# Allegro board S500_TPE_minimal_system_0312PCB.brd
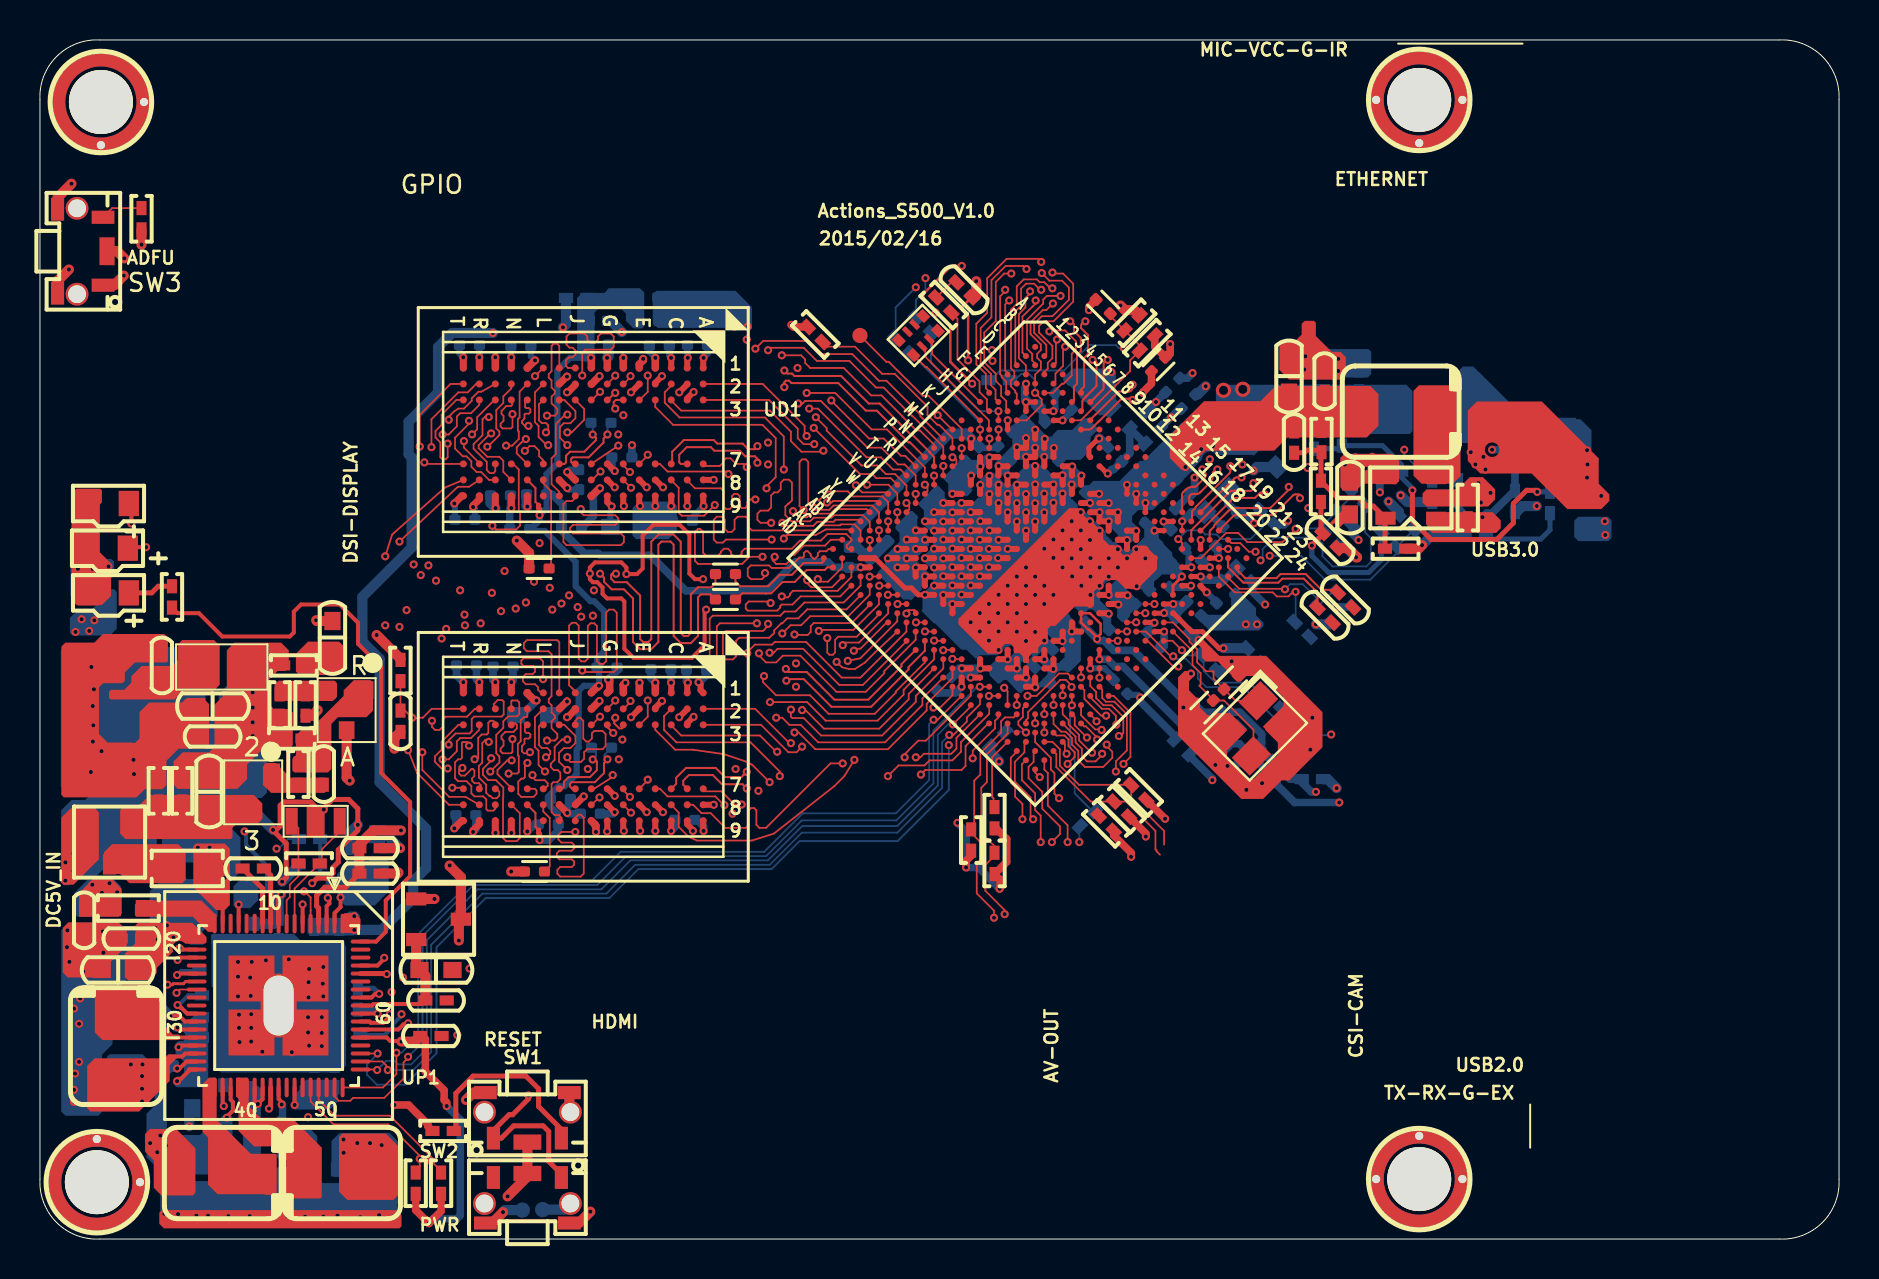
[diagram p0: board, top side]
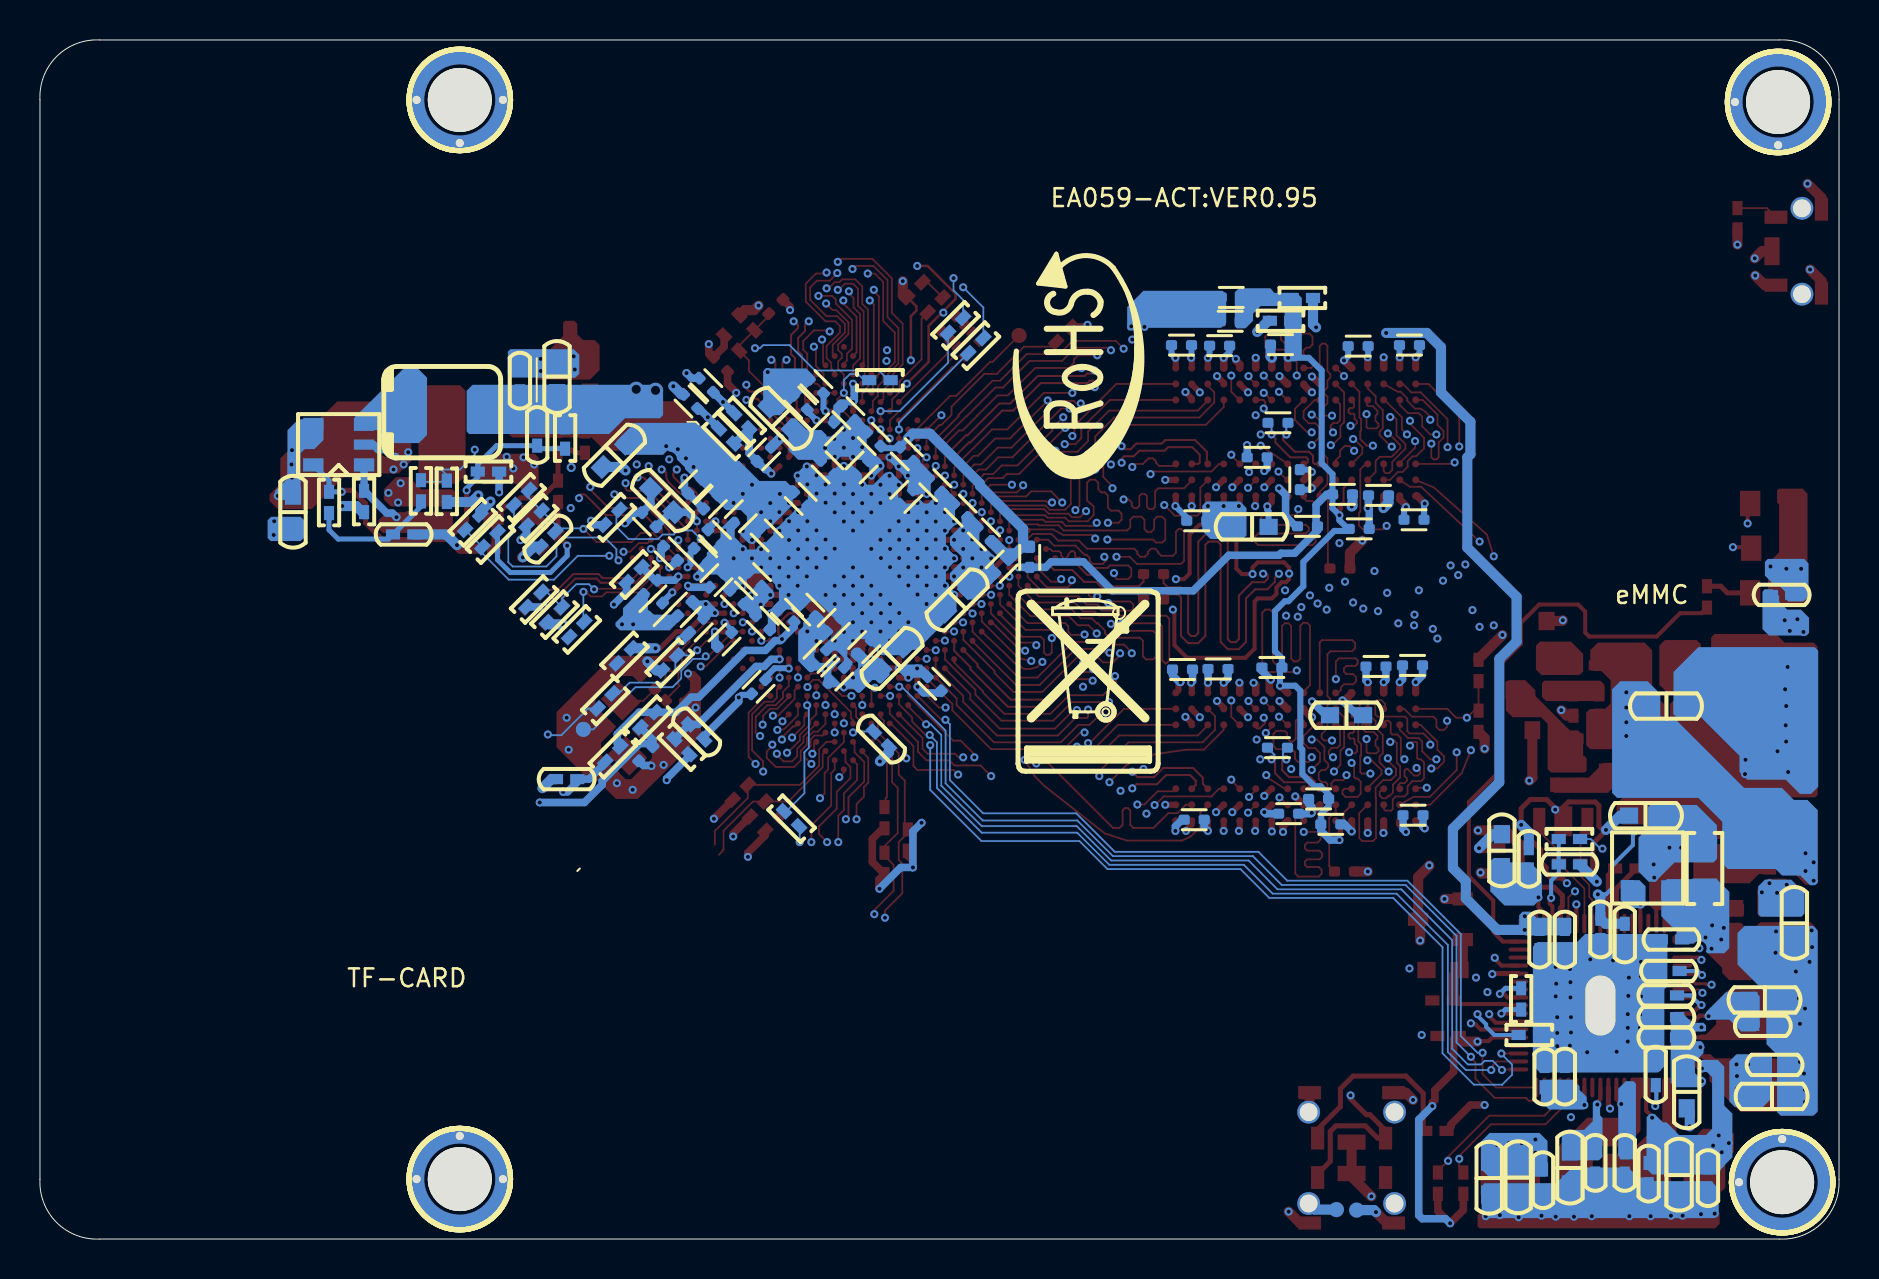
[diagram p1: board, bottom side, seen from below]

Outline 90 x 60 mm; copper layers: TOP, L2_GND, L3, L4, L5_VCC, BOTTOM. Coordinates in mm from the lower left corner of the outline.
Outline path: 0,57 0,3 arc(0.83,0.83) 3,0 87,0 arc(89.17,0.83) 90,3 90,57 arc(89.17,59.17) 87,60 3,60 arc(0.83,59.17) 0,57

## Design rules (mm)
net group AOUTL: nets AOUTL N25870298
net group AOUTR: nets AOUTR N25870765
net group EMMC_RSTN: nets EMMC_RSTN GPIOD15/SPI2_SS
net group NAND_DQS: nets N25955149 NAND_DQS
net group AVDD: nets AVDD CSI_AVDD DVCCIO
net group NET_GND: nets GND
net group S-10: nets CK CK# DDR3_A0 DDR3_A1 DDR3_A2 DDR3_A3 DDR3_A4 DDR3_A5 DDR3_A6 DDR3_A7 DDR3_A8 DDR3_A9 DDR3_A10 DDR3_A11 DDR3_A12 DDR3_A13 DDR3_A14 DDR3_A15 DDR3_BA0 DDR3_BA1 DDR3_BA2 DDR3_CAS# DDR3_CK0 DDR3_CK0# DDR3_CKE0 DDR3_CKE1 DDR3_CS0 DDR3_CS1 DDR3_DQ0 DDR3_DQ1 DDR3_DQ2 DDR3_DQ3 DDR3_DQ4 DDR3_DQ5 DDR3_DQ6 DDR3_DQ7 DDR3_DQ8 DDR3_DQ9 DDR3_DQ10 DDR3_DQ11 DDR3_DQ12 DDR3_DQ13 DDR3_DQ14 DDR3_DQ15 DDR3_DQ16 DDR3_DQ17 DDR3_DQ18 DDR3_DQ19 DDR3_DQ20 DDR3_DQ21 DDR3_DQ22 DDR3_DQ23 DDR3_DQ24 DDR3_DQ25 DDR3_DQ26 DDR3_DQ27 DDR3_DQ28 DDR3_DQ29 DDR3_DQ30 DDR3_DQ31 DDR3_DQM0 DDR3_DQM1 DDR3_DQM2 DDR3_DQM3 DDR3_DQS0 DDR3_DQS0# DDR3_DQS1 DDR3_DQS1# DDR3_DQS2 DDR3_DQS2# DDR3_DQS3 DDR3_DQS3# DDR3_ODT0 DDR3_ODT1 ETH_RXD0/GPIOA20 ETH_RXD1/GPIOA19 ETH_TXD0 ETH_TXD1 ETH_TXEN GPIOD28/PCM1_IN GPIOD29/PCM1_CLK GPIOD30/PCM1_SYNC GPIOD31/PCM1_OUT RXD0 RXD1 TWI0_SCK TWI0_SDA TWI1_SCK TWI1_SDA TWI2_SCK TWI2_SDA TX_CLK UART2_CTSB
net group S-10-20: nets CSI_CN CSI_CP CSI_DN0 CSI_DN1 CSI_DP0 CSI_DP1 HDMI_CLK+ HDMI_CLK- HDMI_D0+ HDMI_D0- HDMI_D1+ HDMI_D1- HDMI_D2+ HDMI_D2- M_DSI_CN M_DSI_CP M_DSI_DN0 M_DSI_DN1 M_DSI_DP0 M_DSI_DP1 TNCK TPCK TXON0 TXON1 TXON2 TXOP0 TXOP1 TXOP2 U3_DM0 U3_DP0 U3_HSIN U3_HSIP U3_HSON U3_HSOP USB3_DM0 USB3_DP0 USB3_RX+ USB3_RX- USB3_TX+ USB3_TX- USB_DM1 USB_DM2 USB_DP1 USB_DP2
net group S-25: nets MDI0+ MDI0- MDI1+ MDI1- SCL0 SDA0 USBHUB1_DMC USBHUB1_DPC USBHUB2_DMC USBHUB2_DPC
net group U3_HSON: nets N25995583
net group U3_HSOP: nets N25995594

## Placement (name value [footprint] x y rotation side)
CD1  10UF 6.3V X5R 0603 T  [C0603]  29.36 35.64 180 bottom
CD2  0.1UF 16V Y5V 0402  [0402_BGA]  21.31 21.21 180 bottom
CD3  0.1UF 16V Y5V 0402  [0402_BGA]  32.26 20.98 0 bottom
CD4  0.1UF 16V Y5V 0402  [0402_BGA]  21.49 44.73 180 bottom
CD5  0.1UF 16V Y5V 0402  [0402_BGA]  23.16 28.65 180 bottom
CD6  0.1UF 16V Y5V 0402  [0402_BGA]  31.06 28.52 180 bottom
CD7  0.1UF 16V Y5V 0402  [0402_BGA]  32.84 28.5 180 bottom
CD8  0.1UF 16V Y5V 0402  [0402_BGA]  21.26 35.99 180 bottom
CD9  0.1UF 16V Y5V 0402  [0402_BGA]  32.13 35.94 0 bottom
CD10  10UF 6.3V X5R 0603 T  [C0603]  24.64 26.21 180 bottom
CD11  0.1UF 16V Y5V 0402  [0402_BGA]  32.89 44.73 180 bottom
CD12  0.1UF 16V Y5V 0402  [0402_BGA]  27.53 21.29 0 bottom
CD13  0.1UF 16V Y5V 0402  [0402_BGA]  21.34 28.7 180 bottom
CD14  0.1UF 16V Y5V 0402  [0402_BGA]  23.04 37.21 180 bottom
CD15  0.1UF 16V Y5V 0402  [0402_BGA]  26.97 38 90 bottom
CD16  0.1UF 16V Y5V 0402  [0402_BGA]  24.05 44.68 0 bottom
CD17  0.1UF 16V Y5V 0402  [0402_BGA]  29.11 39.12 0 bottom
CD18  0.1UF 16V Y5V 0402  [0402_BGA]  30.99 44.7 180 bottom
CD19  0.1UF 16V Y5V 0402  [0402_BGA]  24 35.53 0 bottom
CD20  0.1UF 16V Y5V 0402  [0402_BGA]  26.04 22.02 180 bottom
CD21  0.1UF 16V Y5V 0402  [0402_BGA]  26.59 35.66 180 bottom
CD22  0.1UF 16V Y5V 0402  [0402_BGA]  30.45 45.92 180 bottom
CD23  0.1UF 16V Y5V 0402  [0402_BGA]  30.4 47.12 180 bottom
CD24  0.1UF 16V Y5V 0402  [0402_BGA]  24.84 37.26 180 bottom
CD25  0.1UF 16V Y5V 0402  [0402_BGA]  27.94 44.75 0 bottom
CD26  1UF 6.3V X5R 0402 T  [C0402]  18.03 25.91 270 top
CD27  0.1UF 16V Y5V 0402  [0402_BGA]  40.49 34.11 90 bottom
CD28  0.1UF 16V Y5V 0402  [0402_BGA]  25.43 20.75 180 bottom
CD29  0.1UF 16V Y5V 0402  [0402_BGA]  28.37 28.6 0 bottom
CE1  10P 50V NPO 0402  [C0402]  46.23 47.5 315 top
CK2  0.1UF 16V Y5V 0402  [C0402]  64.59 35.03 315 bottom
CK3  18P 50V 0402 NPO  [0402_BGA]  58.34 26.59 225 top
CK4  18P 50V 0402 NPO  [0402_BGA]  59.59 27.86 45 top
CK7  10UF 6.3V X5R 0603 T  [C0603]  47.37 29.06 135 bottom
CK8  0.1UF 16V Y5V 0402  [0402_BGA]  51 29.13 135 bottom
CK9  0.1UF 16V Y5V 0402  [0402_BGA]  50.29 30.73 135 bottom
CK10  0.1UF 16V Y5V 0402  [0402_BGA]  48.77 29.62 135 bottom
CK11  0.1UF 16V Y5V 0402  [0402_BGA]  50.11 28.24 135 bottom
CK12  0.1UF 16V Y5V 0402  [0402_BGA]  51.56 31.5 45 bottom
CK13  10UF 6.3V X5R 0603 T  [C0603]  52.93 41.07 45 bottom
CK14  0.1UF 16V Y5V 0402  [0402_BGA]  48.9 38.61 315 bottom
CK15  0.1UF 16V Y5V 0402  [0402_BGA]  49.56 41.33 45 bottom
CK16  0.1UF 16V Y5V 0402  [0402_BGA]  50.62 40.51 135 bottom
CK17  0.1UF 16V Y5V 0402  [0402_BGA]  48.29 40.03 225 bottom
CK18  0.1UF 16V Y5V 0402  [0402_BGA]  50.6 38.61 225 bottom
CK19  10UF 6.3V X5R 0603 T  [C0603]  61.26 39.22 315 bottom
CK20  0.1UF 16V Y5V 0402  [0402_BGA]  51.94 37.03 225 bottom
CK21  0.1UF 16V Y5V 0402  [0402_BGA]  57.23 37.67 315 bottom
CK22  0.1UF 16V Y5V 0402  [0402_BGA]  54.94 36.17 315 bottom
CK23  0.1UF 16V Y5V 0402  [0402_BGA]  56.44 36.88 315 bottom
CK24  0.1UF 16V Y5V 0402  [0402_BGA]  53.64 35.2 225 bottom
CK25  10UF 6.3V X5R 0603 T  [C0603]  44.12 31.98 315 bottom
CK26  0.1UF 16V Y5V 0402  [0402_BGA]  46.66 37.13 315 bottom
CK27  0.1UF 16V Y5V 0402  [0402_BGA]  46.63 39.27 45 bottom
CK28  0.1UF 16V Y5V 0402  [0402_BGA]  42.77 35.26 225 bottom
CK29  0.1UF 16V Y5V 0402  [0402_BGA]  45.21 37.72 225 bottom
CK30  0.1UF 16V Y5V 0402  [0402_BGA]  45.26 27.79 225 bottom
CK31  0.1UF 16V Y5V 0402  [0402_BGA]  41.88 33.66 135 bottom
CK32  0.1UF 16V Y5V 0402  [0402_BGA]  43.94 36.45 45 bottom
CK33  0.1UF 16V Y5V 0402  [0402_BGA]  53.85 30.84 225 bottom
CK34  0.1UF 16V Y5V 0402  [0402_BGA]  59.69 24.28 315 bottom
CK35  0.1UF 16V Y5V 0402  [0402_BGA]  56.67 42.72 45 bottom
CK36  0.1UF 16V Y5V 0402  [0402_BGA]  54.23 33.02 45 bottom
CK37  0.1UF 16V Y5V 0402  [0402_BGA]  55.14 32.11 45 bottom
CK38  0.1UF 16V Y5V 0402  [0402_BGA]  56.24 35.13 225 bottom
CK39  0.1UF 16V Y5V 0402  [0402_BGA]  57.45 41.91 45 bottom
CK40  0.1UF 16V Y5V 0402  [0402_BGA]  56.16 32.97 135 bottom
CK41  0.1UF 16V Y5V 0402  [0402_BGA]  55.75 30 315 bottom
CK42  0.1UF 16V Y5V 0402  [0402_BGA]  59.21 31.47 315 bottom
CK43  0.1UF 16V Y5V 0402  [0402_BGA]  54.05 27.64 315 bottom
CK44  0.1UF 16V Y5V 0402  [0402_BGA]  55.96 43.76 225 top
CK45  0.1UF 16V Y5V 0402  [0402_BGA]  57.73 31.55 315 bottom
CK46  0.1UF 16V Y5V 0402  [0402_BGA]  57.15 30.71 315 bottom
CK47  0.1UF 16V Y5V 0402  [0402_BGA]  58.45 34.32 45 bottom
CK48  10UF 6.3V X5R 0603 T  [C0603]  58.85 36.96 45 bottom
CK49  0.1UF 16V Y5V 0402  [0402_BGA]  59.54 35.99 45 bottom
CK50  0.1UF 16V Y5V 0402  [0402_BGA]  51.16 42.67 45 bottom
CK51  1UF 16V X5R 0402 T  [0402_BGA]  51.97 41.86 45 bottom
CK52  1UF 16V X5R 0402 T  [C0402]  63.65 23.01 0 bottom
CK53  1UF 16V X5R 0402 T  [0402_BGA]  59.46 32.61 315 bottom
CK54  1UF 16V X5R 0402 T  [C0402]  57.15 25.37 225 bottom
CK55  0.1UF 16V Y5V 0402  [0402_BGA]  56.92 34.21 225 bottom
CK56  1UF 16V X5R 0402 T  [C0402]  47.9 25.02 225 bottom
CK60  0.1UF 16V Y5V 0402  [C0402]  2.87 32.23 180 bottom
CK61  1UF 16V X5R 0402 T  [0402_BGA]  52.63 31.24 45 bottom
CK62  1UF 16V X5R 0402 T  [0402_BGA]  53.19 46.66 135 top
CK63  1UF 16V X5R 0402 T  [0402_BGA]  53.77 39.27 135 bottom
CP3  10UF 6.3V X5R 0603 T  [C0603]  9.68 21.18 0 bottom
CP5  4.7UF 6.3V 0402 X5R T  [C0402]  4.57 15.04 0 top
CP6  10UF 6.3V X5R 0603 T  [C0603]  16.05 3.07 270 bottom
CP7  10UF 6.3V X5R 0603 T  [C0603]  17.5 3.05 270 bottom
CP8  0.1UF 16V Y5V 0402  [C0402]  14.81 2.95 270 bottom
CP9  0.1UF 16V Y5V 0402 /NI  [C0402]  10.67 18.54 180 top
CP10  10UF 6.3V X5R 0603 T  [C0603]  7.62 7.37 90 bottom
CP11  0.1UF 16V Y5V 0402  [C0402]  8.64 10.08 180 bottom
CP12  10UF 6.3V X5R 0603 T  [C0603]  2.24 15.8 270 bottom
CP13  0.1UF 16V Y5V 0402  [C0402]  2.21 15.95 270 top
CP14  10UF 6.3V X5R 0603 T  [C0603]  65.53 37.08 270 top
CP15  18P 50V 0402 NPO /NI  [C0402]  62.74 39.88 270 top
CP16  10UF 6.3V X5R 0603 T  [C0603]  3.35 7.14 180 bottom
CP17  0.1UF 16V Y5V 0402  [C0402]  3.23 8.71 180 bottom
CP18  10UF 6.3V X5R 0603 T  [C0603]  62.48 43.18 90 top
CP19  0.1UF 16V Y5V 0402  [C0402]  64.26 42.93 270 top
CP20  10UF 6.3V X5R 0603 T  [C0603]  16.87 19.43 270 bottom
CP21  0.1UF 16V Y5V 0402  [C0402]  10.72 3.81 90 bottom
CP22  10UF 6.3V X5R 0603 T  [C0603]  8 3.2 270 bottom
CP23  0.1UF 16V Y5V 0402  [C0402]  6.55 3.05 270 bottom
CP24  0.1UF 16V Y5V 0402  [C0402]  64.54 34.95 135 top
CP25  10UF 6.3V X5R 0603 T  [C0603]  3.91 13.46 0 top
CP26  0.1UF 16V Y5V 0402  [C0402]  15.52 19.02 270 bottom
CP27  0.1UF 16V Y5V 0402  [C0402]  10.72 15.24 270 bottom
CP28  4.7UF 6.3V 0402 X5R T  [C0402]  11.94 15.49 270 bottom
CP29  10UF 6.3V X5R 0603 T  [C0603]  77.34 36.37 270 bottom
CP30  18P 50V 0402 NPO /NI  [C0402]  65.13 40.23 270 bottom
CP31  0.1UF 16V Y5V 0402  [C0402]  16.51 18.29 0 top
CP32  22P 50V NPO 0402  [C0402]  13.49 18.75 0 bottom
CP33  10UF 6.3V X5R 0603 T  [C0603]  64.14 43.15 90 bottom
CP34  0.1UF 16V Y5V 0402  [C0402]  65.99 42.95 270 bottom
CP35  4.7UF 6.3V 0402 X5R T  [C0402]  16.51 19.56 0 top
CP36  10UF 6.3V X5R 0603 T  [C0603]  19.81 13.46 180 top
CP37  0.1UF 16V Y5V 0402  [C0402]  19.81 11.94 0 top
CP38  0.1UF 16V Y5V 0402  [C0402]  13.72 8.13 90 bottom
CP39  0.1UF 16V Y5V 0402  [C0402]  71.81 35.26 0 bottom
CP40  0.1UF 16V Y5V 0402  [C0402]  19.56 10.16 0 top
CP41  10UF 6.3V X5R 0603 T  [C0603]  13.46 3.56 270 bottom
CP42  4.7UF 6.3V 0402 X5R T  [C0402]  12.19 3.81 90 bottom
CP43  4.7UF 6.3V 0402 X5R T  [C0402]  13.72 14.99 90 bottom
CP44  22P 50V NPO 0402  [C0402]  14.2 23.27 90 top
CP45  0.1UF 16V Y5V 0402  [C0402]  14.99 14.99 90 bottom
CP46  4.7UF 6.3V 0402 X5R T  [C0402]  14.73 8.13 270 bottom
CP47  0.1UF 16V Y5V 0402  [C0402]  8.64 11.1 0 bottom
CP48  10UF 6.3V X5R 0603 T  [C0603]  3.71 11.96 180 bottom
CP49  0.1UF 16V Y5V 0402  [C0402]  3.81 10.67 0 bottom
CP50  0.1UF 16V Y5V 0402  [C0402]  8.38 14.99 0 bottom
CP51  4.7UF 6.3V 0402 X5R T  [C0402]  8.64 12.19 180 bottom
CP52  4.7UF 6.3V 0402 X5R T  [C0402]  8.51 13.41 180 bottom
CP53  0.1UF 16V Y5V 0402  [C0402]  9.53 3.28 270 bottom
CP54  4.7UF 6.3V 0402 X5R T  [C0402]  9.17 8.23 270 bottom
CP55  22UF 6.3V X5R 0805  [C0603]  8.64 26.67 180 top
CP56  22UF 6.3V X5R 0805  [C0603]  8.64 26.67 180 bottom
CP57  0.1UF 16V Y5V 0402  [C0402]  8.64 25.15 0 top
CP61  1UF 16V X5R 0402 T  [C0603]  14.63 30.1 90 top
CP62  100P 50V NPO 0402  [C0402]  6.1 28.7 270 top
CP63  1UF 16V X5R 0402 T  [C0603]  8.46 22.38 270 top
CU5  0.1UF 16V Y5V 0402  [C0402]  64.29 31.22 135 top
CU6  0.1UF 16V Y5V 0402  [C0402]  65.3 31.98 135 top
DP1  AM431 SOT23  [SOT23_ARC]  15.34 26.47 180 top
FSH1  FUSE 0805 2.6A 35mOHM  [SRP-P260]  9.09 28.63 0 top
LED1  GREEN CHIP LED 0805  [SMDLED_2P_0805-20051213]  3.43 32.33 180 top
LED2  GREEN CHIP LED 0805 /NI  [SMDLED_2P_0805-20051213]  3.38 34.57 180 top
LED3  GREEN CHIP LED 0805 /NI  [SMDLED_2P_0805-20051213]  3.43 36.8 180 top
LP1  CHOKE 2.2UH 3A 4.3X4.7 SMD  [SMD_CHOKE_4X4_4H2MM]  15.11 3.3 0 top
LP2  CHOKE 2.2UH 3A 4.3X4.7 SMD  [SMD_CHOKE_4X4_4H2MM]  3.81 9.65 270 top
LP3  CHOKE 2.2UH 3A 4.3X4.7 SMD  [SMD_CHOKE_4X4_4H2MM]  68.07 41.4 180 top
LP4  CHOKE 4.7UH 2A 4.3X4.7 SMD  [SMD_CHOKE_4X4_4H2MM]  9.14 3.3 180 top
LP5  CHOKE 2.2UH 3A 4.3X4.7 SMD  [SMD_CHOKE_4X4_4H2MM]  69.88 41.38 180 bottom
MH1  MT /NI  [PAD120-4-ECX#2]  69 57 0 top
MH2  MT /NI  [PAD120-4-ECX#3]  3.05 56.9 0 top
MH3  MT /NI  [PAD120-4-ECX]  2.84 2.84 0 top
MH4  MT /NI  [PAD120-4-ECX#4]  69 3 0 top
NOREF  -  []  38.16 43.67 90 bottom
NOREF#2  -  []  37.57 27.27 180 bottom
QP1  P5103EMG SOT23  [SOT23-GDS]  9.58 18.57 180 bottom
QP2  2N3906 SOT23  [SOT23_123]  10.67 22.35 180 top
QP3  P5103EMG SOT23  [SOT23-GDS]  3.48 19.86 180 top
RD1  0 0402  [0402_BGA]  34.29 33.27 180 top
RD2  1K 0402  [R0402]  18.03 28.45 270 top
RD3  2.2K 1% 0402  [R0402]  26.85 47.09 180 bottom
RD4  120 0402  [0402_BGA]  28.09 24.59 180 bottom
RD5  120 0402  [0402_BGA]  28.07 40.84 180 bottom
RD6  0 0402  [0402_BGA]  34.29 32 180 top
RD7  2.2K 1% 0402  [R0402]  27.94 45.95 180 bottom
RD8  240 1% 0402  [0402_BGA]  24.97 33.55 180 top
RD9  240 1% 0402  [0402_BGA]  24.74 18.39 180 top
RE1  22 0402  [R0402]  43.18 44.7 135 bottom
RE2  22 0402  [R0402]  44.2 45.72 135 bottom
RE3  22 0402  [R0402]  45.21 46.74 135 top
RE20  22 0402  [R0402]  61.72 26.92 315 bottom
RF2  0 0402/NI  [R0402]  5.08 51.05 90 top
RK3  240 1% 0402  [R0402]  38.79 45.26 135 top
RK4  2.2K 0402  [R0402]  46.58 19.96 270 top
RK6  2.2K 0402  [R0402]  47.75 18.8 270 top
RK10  2.2K 0402  [R0402]  54.1 21.51 315 top
RK11  2.2K 0402  [R0402]  54.97 22.35 315 top
RK18  4.7K 0402 /NI  [R0402]  47.75 21.08 270 top
RK19  0 0402  [R0402]  52.4 21.03 225 bottom
RK21  10K 0402  [R0402]  65.28 36.07 315 bottom
RK22  100 0402  [R0402]  65.91 37.11 135 bottom
RK24  1K 0402  [R0402]  63.14 30.51 135 bottom
RK27  1K 0402  [R0402]  60.76 29.18 135 bottom
RK28  0 0402  [R0402]  61.39 36.12 135 bottom
RK29  22 0402  [R0402]  47.98 42.98 180 bottom
RK30  0 0402 /NI  [R0402]  65.28 32 315 bottom
RK31  0 0402  [R0402]  64.26 31.24 135 bottom
RK32  10K 0402 /NI  [R0402]  58.5 28.83 315 bottom
RNP1  0 8P4R 0402  [8P4R-0402]  43.94 45.21 45 top
RP4  0  [R0603]  4.42 16.56 0 top
RP5  47K 0402 /NI  [R0402]  71.42 36.6 270 top
RP6  100K 1% 0402  [R0402]  64.11 39.9 90 top
RP7  120K 1% 0402  [R0402]  67.82 34.54 0 top
RP8  100 0402  [R0402]  20.17 5.41 0 top
RP9  10K 1% 0402  [R0402]  67.49 35 135 bottom
RP10  180K 1% 0402  [R0402]  64.08 37.41 90 top
RP11  100K 5% 0402 /NI  [R0402]  68.35 35.86 315 bottom
RP12  10M 0402  [R0402]  13.46 18.8 180 top
RP16  100 0402  [R0402]  13.49 20.02 180 bottom
RP17  47K 0402 /NI  [R0402]  73.79 36.91 90 bottom
RP18  100K 1% 0402  [R0402]  63.73 40.08 90 bottom
RP19  120K 1% 0402  [R0402]  67.56 38.4 180 bottom
RP20  10K 1% 0402  [R0402]  70.94 37.44 270 bottom
RP21  180K 1% 0402  [R0402]  75.54 36.86 90 bottom
RP22  100K 5% 0402 /NI  [R0402]  69.65 37.41 90 bottom
RP23  470 0402  [R0402]  6.6 32.13 90 top
RP25  0 0805  [R0805]  7.37 18.54 0 top
RP27  0 0805 /NI  [R0805]  6.73 18.54 270 bottom
RP28  4.7K 1% 0402  [R0402]  13.28 26.72 270 top
RP29  6.2K 1% 0402  [R0402]  11.99 26.72 90 top
RP30  1K 0402  [R0402]  12.6 25.04 0 top
RP31  1K 0402  [R0402]  12.93 23.27 270 top
RP32  47K 0402  [R0402]  7.11 22.43 90 top
RP33  10K 0402  [R0402]  5.94 22.43 270 top
RP34  1K 0402  [R0402]  12.7 28.7 180 top
RS24  0 0402  [R0402]  15.49 10.21 0 bottom
RS30  0 0402 /NI  [R0402]  15.9 12.01 270 bottom
RS34  47K 0402  [R0402]  53.34 20.8 135 top
RZ1  4.7K 0402  [R0402]  20.07 2.79 90 top
RZ2  4.7K 0402  [R0402]  18.8 2.79 90 top
RZ3  0 0402  [R0402]  59.59 25.98 315 bottom
RZ4  0 0402 /NI  [R0402]  61.34 24.26 315 bottom
RZ5  0 0402  [R0402]  55.4 44.83 45 top
RZ6  0 0402 /NI  [R0402]  54.64 45.85 45 top
RZ7  0 0402  [R0402]  55.65 40.18 45 bottom
RZ8  0 0402  /NI  [R0402]  54.89 40.94 45 bottom
RZ9  0 0402 /NI  [R0402]  57.89 24.64 225 bottom
RZ10  0 0402  [R0402]  60.27 33.25 315 bottom
SW1  MTA2-WNC-Q-TR /NI  [SMD-SW-MTA2-WNC-2P]  133.6 -212.09 90 top
SW2  MTA2-WNC-Q-TR  [SMD-SW-MTA2-WNC-2P]  -84.84 220.22 270 top
SW3  MTA2-WNC-Q-TR  [SMD-SW-MTA2-WNC-2P]  220.29 158.65 180 top
TP8  TP /NI  [TP30]  24.13 1.45 180 bottom
TP9  TP /NI  [TP30]  25.15 1.47 180 bottom
TP16  TP /NI  [TP30]  41.02 45.21 0 top
TP25  TP /NI  [TP30]  62.81 25.5 180 bottom
U1  ATM7059 TFBGA496  [ATM7059_496]  49.78 34.07 315 top
UD1  MT41K256M16HA FBGA96  [BGA96_P080_10X14MM]  27.18 40.39 270 top
UD2  MT41K256M16HA FBGA96  [BGA96_P080_10X14MM]  27.18 24.13 270 top
UP1  ATC2603C QFN68  [ATC2603_QFN68_0_4]  11.94 11.68 270 top
UP2  RT8059 TSOT23-5  [SOT23-5]  68.58 37.08 90 top
UP3  RT8059 TSOT23-5  [SOT23-5]  75.06 39.75 90 bottom
UP4  AP2138N-1.5V SOT23  [SOT23-123]  19.94 16 270 top
YK1  24MHZ 12PF 30PPM 3.2X2.5  [XTAL-3_2X2_5MM]  60.78 25.55 225 top
YP1  32.768KHZ_CITIZEN  [XTAL-CM315]  13.79 20.9 180 top

## Library data of the parts
CD1 CD10 CK7 CK13 CK19 CK25 CK48 CP3 CP6 CP7 CP10 CP12 CP14 CP16 CP18 CP20 CP22 CP25 CP29 CP33 CP36 CP41 CP48 CP55 CP56 CP61 CP63 = C0603
CD2-CD9 CD11-CD25 CD27-CD29 CK3 CK4 CK8-CK12 CK14-CK18 CK20-CK24 CK26-CK47 CK51 CK53 CK61-CK63 RD4 RD5 RD8 RD9 = 0402_BGA
CD26 CE1 CK52 CK54 CK56 CP5 CP9 CP15 CP28 CP30 CP32 CP35 CP42-CP44 CP46 CP51 CP52 CP54 CP62 = C0402
CK2 CK60 CP8 CP11 CP13 CP17 CP19 CP21 CP23 CP24 CP26 CP27 CP31 CP34 CP37-CP40 CP45 CP47 CP49 CP50 CP53 CP57 CU5 CU6 = C0402: signal model: C0402_0_1UF_16V_Y5V_0402
CK49 CK50 CK55 = 0402_BGA: signal model: C0402_0_1UF_16V_Y5V_0402
DP1 = SOT23_ARC
FSH1 = SRP-P260
LED1-LED3 = SMDLED_2P_0805-20051213
LP1-LP5 = SMD_CHOKE_4X4_4H2MM
MH1-MH4 = PAD120-4-ECX
QP1 QP3 = SOT23-GDS
QP2 = SOT23_123
RD1 RD6 = 0402_BGA: signal model: 0402_BGA_0_1UF_16V_Y5V_0402
RD2 RD3 RD7 RE1-RE3 RE20 RF2 RK3 RK4 RK6 RK10 RK11 RK18 RK19 RK21 RK22 RK24 RK27-RK29 RK32 RP5-RP12 RP16-RP23 RP28-RP34 RS24 RS30 RS34 RZ1 RZ2 RZ4 RZ6 RZ7 RZ10 = R0402
RK30 RK31 RZ3 RZ5 RZ8 RZ9 = R0402: signal model: R0402_0_0402__NI
RNP1 = 8P4R-0402
RP4 = R0603
RP25 RP27 = R0805
SW1-SW3 = SMD-SW-MTA2-WNC-2P
TP8 TP9 TP16 TP25 = TP30
U1 = ATM7059_496
UD1 UD2 = BGA96_P080_10X14MM
UP1 = ATC2603_QFN68_0_4
UP2 UP3 = SOT23-5
UP4 = SOT23-123
YK1 = XTAL-3_2X2_5MM
YP1 = XTAL-CM315

## Footprints (pads in the part's own frame, mm; a bottom-side part is the same pattern mirrored in y, then rotated)
8P4R-0402
  rect 0.457x0.559 smd: 1(-0.864,-0.521) 2(-0.864,0.521) 7(0.864,-0.521) 8(0.864,0.521)
  rect 0.254x0.559 smd: 3(-0.254,-0.521) 4(-0.254,0.521) 5(0.254,-0.521) 6(0.254,0.521)
0402_BGA
  custom 0.559x0.508 smd: 1(-0.5,0) 2(0.5,0)
ATC2603_QFN68_0_4
  oval 0.991x0.203 smd: 1(-4.1,3.2) 2(-4.1,2.799) 3(-4.1,2.4) 4(-4.1,2.002) 5(-4.1,1.6) 6(-4.1,1.201) 7(-4.1,0.8) 8(-4.1,0.401) 9(-4.1,0) 10(-4.1,-0.399) 11(-4.1,-0.8) 12(-4.1,-1.199) 13(-4.1,-1.6) 14(-4.1,-1.999) 15(-4.1,-2.4) 16(-4.1,-2.799) 17(-4.1,-3.2) 35(4.1,-3.2) 36(4.1,-2.799) 37(4.1,-2.4) 38(4.1,-1.999) 39(4.1,-1.6) 40(4.1,-1.199) 41(4.1,-0.8) 42(4.1,-0.399) 43(4.1,0) 44(4.1,0.401) 45(4.1,0.8) 46(4.1,1.201) 47(4.1,1.6) 48(4.1,2.002) 49(4.1,2.4) 50(4.1,2.799) 51(4.1,3.2)
  oval 0.203x0.991 smd: 18(-3.2,-4.1) 19(-2.799,-4.1) 20(-2.4,-4.1) 21(-1.999,-4.1) 22(-1.6,-4.1) 23(-1.201,-4.1) 24(-0.8,-4.1) 25(-0.401,-4.1) 26(0,-4.1) 27(0.401,-4.1) 28(0.8,-4.1) 29(1.199,-4.1) 30(1.6,-4.1) 31(1.999,-4.1) 32(2.4,-4.1) 33(2.799,-4.1) 34(3.2,-4.1) 52(3.2,4.1) 53(2.799,4.1) 54(2.4,4.1) 55(1.999,4.1) 56(1.6,4.1) 57(1.199,4.1) 58(0.8,4.1) 59(0.401,4.1) 60(0,4.1) 61(-0.401,4.1) 62(-0.8,4.1) 63(-1.201,4.1) 64(-1.6,4.1) 65(-1.999,4.1) 66(-2.4,4.1) 67(-2.799,4.1) 68(-3.2,4.1)
  oval 3.2x1.803 hole 2.997x1.499: 69(0,0)
ATM7059_496
  round 0 smd: (-9.652,9.652) (9.652,-9.652)
  round 0.305 smd: A1(-7.475,7.475) A2(-6.825,7.475) A3(-6.175,7.475) A4(-5.524,7.475) A6(-4.224,7.475) A7(-3.576,7.475) A9(-2.276,7.475) A10(-1.626,7.475) A12(-0.325,7.475) A13(0.325,7.475) A15(1.626,7.475) A16(2.276,7.475) A18(3.576,7.475) A19(4.224,7.475) A21(5.524,7.475) A22(6.175,7.475) A23(6.825,7.475) A24(7.475,7.475) AA1(-7.475,-5.524) AA2(-6.825,-5.524) AA3(-6.175,-5.524) AA15(1.626,-5.524) AA16(2.276,-5.524) AA19(4.224,-5.524) AA20(4.874,-5.524) AA21(5.524,-5.524) AA22(6.175,-5.524) AA23(6.825,-5.524) AA24(7.475,-5.524) AB1(-7.475,-6.175) AB2(-6.825,-6.175) AB3(-6.175,-6.175) AB4(-5.524,-6.175) AB5(-4.874,-6.175) AB6(-4.224,-6.175) AB7(-3.576,-6.175) AB8(-2.926,-6.175) AB9(-2.276,-6.175) AB10(-1.626,-6.175) AB11(-0.975,-6.175) AB12(-0.325,-6.175) AB13(0.325,-6.175) AB14(0.975,-6.175) AB15(1.626,-6.175) AB16(2.276,-6.175) AB17(2.926,-6.175) AB18(3.576,-6.175) AB19(4.224,-6.175) AB20(4.874,-6.175) AB21(5.524,-6.175) AB22(6.175,-6.175) AB23(6.825,-6.175) AB24(7.475,-6.175) AC1(-7.475,-6.825) AC2(-6.825,-6.825) AC3(-6.175,-6.825) AC4(-5.524,-6.825) AC5(-4.874,-6.825) AC6(-4.224,-6.825) AC7(-3.576,-6.825) AC8(-2.926,-6.825) AC9(-2.276,-6.825) AC10(-1.626,-6.825) AC11(-0.975,-6.825) AC12(-0.325,-6.825) AC13(0.325,-6.825) AC14(0.975,-6.825) AC15(1.626,-6.825) AC16(2.276,-6.825) AC17(2.926,-6.825) AC18(3.576,-6.825) AC19(4.224,-6.825) AC20(4.874,-6.825) AC21(5.524,-6.825) AC22(6.175,-6.825) AC23(6.825,-6.825) AC24(7.475,-6.825) AD1(-7.475,-7.475) AD2(-6.825,-7.475) AD3(-6.175,-7.475) AD4(-5.524,-7.475) AD5(-4.874,-7.475) AD6(-4.224,-7.475) AD7(-3.576,-7.475) AD8(-2.926,-7.475) AD9(-2.276,-7.475) AD10(-1.626,-7.475) AD11(-0.975,-7.475) AD12(-0.325,-7.475) AD13(0.325,-7.475) AD14(0.975,-7.475) AD15(1.626,-7.475) AD16(2.276,-7.475) AD17(2.926,-7.475) AD18(3.576,-7.475) AD19(4.224,-7.475) AD21(5.524,-7.475) AD22(6.175,-7.475) AD23(6.825,-7.475) AD24(7.475,-7.475) B1(-7.475,6.825) B2(-6.825,6.825) B3(-6.175,6.825) B4(-5.524,6.825) B5(-4.874,6.825) B6(-4.224,6.825) B7(-3.576,6.825) B8(-2.926,6.825) B9(-2.276,6.825) B10(-1.626,6.825) B11(-0.975,6.825) B12(-0.325,6.825) B13(0.325,6.825) B14(0.975,6.825) B15(1.626,6.825) B16(2.276,6.825) B17(2.926,6.825) B18(3.576,6.825) B19(4.224,6.825) B20(4.874,6.825) B21(5.524,6.825) B22(6.175,6.825) B23(6.825,6.825) B24(7.475,6.825) C1(-7.475,6.175) C2(-6.825,6.175) C3(-6.175,6.175) C4(-5.524,6.175) C5(-4.874,6.175) C6(-4.224,6.175) C7(-3.576,6.175) C8(-2.926,6.175) C10(-1.626,6.175) C11(-0.975,6.175) C12(-0.325,6.175) C14(0.975,6.175) C15(1.626,6.175) C16(2.276,6.175) C17(2.926,6.175) C18(3.576,6.175) C19(4.224,6.175) C20(4.874,6.175) C21(5.524,6.175) C22(6.175,6.175) C23(6.825,6.175) C24(7.475,6.175) D1(-7.475,5.524) D2(-6.825,5.524) D3(-6.175,5.524) D4(-5.524,5.524) D5(-4.874,5.524) D6(-4.224,5.524) D10(-1.626,5.524) D11(-0.975,5.524) D14(0.975,5.524) D15(1.626,5.524) D16(2.276,5.524) D17(2.926,5.524) D18(3.576,5.524) D20(4.874,5.524) D21(5.524,5.524) D22(6.175,5.524) D23(6.825,5.524) D24(7.475,5.524) E2(-6.825,4.874) E3(-6.175,4.874) E4(-5.524,4.874) E21(5.524,4.874) E22(6.175,4.874) E23(6.825,4.874) F1(-7.475,4.224) F2(-6.825,4.224) F3(-6.175,4.224) F4(-5.524,4.224) F6(-4.224,4.224) F7(-3.576,4.224) F8(-2.926,4.224) F9(-2.276,4.224) F10(-1.626,4.224) F11(-0.975,4.224) F12(-0.325,4.224) F13(0.325,4.224) F14(0.975,4.224) F15(1.626,4.224) F16(2.276,4.224) F17(2.926,4.224) F18(3.576,4.224) F19(4.224,4.224) F21(5.524,4.224) F22(6.175,4.224) F23(6.825,4.224) F24(7.475,4.224) G1(-7.475,3.576) G2(-6.825,3.576) G3(-6.175,3.576) G4(-5.524,3.576) G6(-4.224,3.576) G7(-3.576,3.576) G8(-2.926,3.576) G9(-2.276,3.576) G10(-1.626,3.576) G11(-0.975,3.576) G12(-0.325,3.576) G13(0.325,3.576) G14(0.975,3.576) G15(1.626,3.576) G16(2.276,3.576) G17(2.926,3.576) G18(3.576,3.576) G19(4.224,3.576) G21(5.524,3.576) G22(6.175,3.576) G23(6.825,3.576) G24(7.475,3.576) H2(-6.825,2.926) H3(-6.175,2.926) H4(-5.524,2.926) H6(-4.224,2.926) H7(-3.576,2.926) H8(-2.926,2.926) H9(-2.276,2.926) H10(-1.626,2.926) H11(-0.975,2.926) H12(-0.325,2.926) H13(0.325,2.926) H14(0.975,2.926) H15(1.626,2.926) H16(2.276,2.926) H17(2.926,2.926) H18(3.576,2.926) H19(4.224,2.926) H21(5.524,2.926) H22(6.175,2.926) H23(6.825,2.926) J1(-7.475,2.276) J2(-6.825,2.276) J3(-6.175,2.276) J4(-5.524,2.276) J5(-4.874,2.276) J6(-4.224,2.276) J7(-3.576,2.276) J8(-2.926,2.276) J9(-2.276,2.276) J10(-1.626,2.276) J11(-0.975,2.276) J12(-0.325,2.276) J13(0.325,2.276) J14(0.975,2.276) J15(1.626,2.276) J16(2.276,2.276) J17(2.926,2.276) J18(3.576,2.276) J19(4.224,2.276) J21(5.524,2.276) J22(6.175,2.276) J23(6.825,2.276) J24(7.475,2.276) K1(-7.475,1.626) K2(-6.825,1.626) K3(-6.175,1.626) K4(-5.524,1.626) K5(-4.874,1.626) K6(-4.224,1.626) K7(-3.576,1.626) K8(-2.926,1.626) K9(-2.276,1.626) K10(-1.626,1.626) K11(-0.975,1.626) K12(-0.325,1.626) K13(0.325,1.626) K14(0.975,1.626) K15(1.626,1.626) K16(2.276,1.626) K17(2.926,1.626) K18(3.576,1.626) K19(4.224,1.626) K21(5.524,1.626) K22(6.175,1.626) K23(6.825,1.626) K24(7.475,1.626) L1(-7.475,0.975) L2(-6.825,0.975) L3(-6.175,0.975) L5(-4.874,0.975) L6(-4.224,0.975) L7(-3.576,0.975) L8(-2.926,0.975) L9(-2.276,0.975) L10(-1.626,0.975) L11(-0.975,0.975) L12(-0.325,0.975) L13(0.325,0.975) L14(0.975,0.975) L15(1.626,0.975) L16(2.276,0.975) L17(2.926,0.975) L18(3.576,0.975) L19(4.224,0.975) L21(5.524,0.975) L22(6.175,0.975) L23(6.825,0.975) M1(-7.475,0.325) M2(-6.825,0.325) M3(-6.175,0.325) M5(-4.874,0.325) M6(-4.224,0.325) M7(-3.576,0.325) M8(-2.926,0.325) M9(-2.276,0.325) M10(-1.626,0.325) M11(-0.975,0.325) M12(-0.325,0.325) M13(0.325,0.325) M14(0.975,0.325) M15(1.626,0.325) M16(2.276,0.325) M17(2.926,0.325) M18(3.576,0.325) M19(4.224,0.325) M21(5.524,0.325) M22(6.175,0.325) M23(6.825,0.325) M24(7.475,0.325) N1(-7.475,-0.325) N2(-6.825,-0.325) N3(-6.175,-0.325) N5(-4.874,-0.325) N6(-4.224,-0.325) N7(-3.576,-0.325) N8(-2.926,-0.325) N9(-2.276,-0.325) N10(-1.626,-0.325) N11(-0.975,-0.325) N12(-0.325,-0.325) N13(0.325,-0.325) N14(0.975,-0.325) N15(1.626,-0.325) N16(2.276,-0.325) N17(2.926,-0.325) N18(3.576,-0.325) N19(4.224,-0.325) N21(5.524,-0.325) N22(6.175,-0.325) N23(6.825,-0.325) N24(7.475,-0.325) P1(-7.475,-0.975) P2(-6.825,-0.975) P3(-6.175,-0.975) P5(-4.874,-0.975) P6(-4.224,-0.975) P7(-3.576,-0.975) P8(-2.926,-0.975) P9(-2.276,-0.975) P10(-1.626,-0.975) P11(-0.975,-0.975) P12(-0.325,-0.975) P13(0.325,-0.975) P14(0.975,-0.975) P15(1.626,-0.975) P16(2.276,-0.975) P17(2.926,-0.975) P18(3.576,-0.975) P19(4.224,-0.975) P21(5.524,-0.975) P22(6.175,-0.975) P23(6.825,-0.975) R1(-7.475,-1.626) R2(-6.825,-1.626) R3(-6.175,-1.626) R5(-4.874,-1.626) R6(-4.224,-1.626) R7(-3.576,-1.626) R8(-2.926,-1.626) R9(-2.276,-1.626) R10(-1.626,-1.626) R11(-0.975,-1.626) R12(-0.325,-1.626) R13(0.325,-1.626) R14(0.975,-1.626) R15(1.626,-1.626) R16(2.276,-1.626) R17(2.926,-1.626) R18(3.576,-1.626) R19(4.224,-1.626) R21(5.524,-1.626) R22(6.175,-1.626) R23(6.825,-1.626) R24(7.475,-1.626) T1(-7.475,-2.276) T2(-6.825,-2.276) T3(-6.175,-2.276) T5(-4.874,-2.276) T6(-4.224,-2.276) T7(-3.576,-2.276) T8(-2.926,-2.276) T9(-2.276,-2.276) T10(-1.626,-2.276) T11(-0.975,-2.276) T12(-0.325,-2.276) T13(0.325,-2.276) T14(0.975,-2.276) T15(1.626,-2.276) T16(2.276,-2.276) T17(2.926,-2.276) T18(3.576,-2.276) T19(4.224,-2.276) T21(5.524,-2.276) T22(6.175,-2.276) T23(6.825,-2.276) T24(7.475,-2.276) U1(-7.475,-2.926) U2(-6.825,-2.926) U3(-6.175,-2.926) U5(-4.874,-2.926) U6(-4.224,-2.926) U7(-3.576,-2.926) U8(-2.926,-2.926) U9(-2.276,-2.926) U10(-1.626,-2.926) U11(-0.975,-2.926) U12(-0.325,-2.926) U13(0.325,-2.926) U14(0.975,-2.926) U15(1.626,-2.926) U16(2.276,-2.926) U17(2.926,-2.926) U18(3.576,-2.926) U19(4.224,-2.926) U21(5.524,-2.926) U22(6.175,-2.926) U23(6.825,-2.926) V1(-7.475,-3.576) V2(-6.825,-3.576) V3(-6.175,-3.576) V5(-4.874,-3.576) V6(-4.224,-3.576) V7(-3.576,-3.576) V8(-2.926,-3.576) V9(-2.276,-3.576) V10(-1.626,-3.576) V11(-0.975,-3.576) V12(-0.325,-3.576) V13(0.325,-3.576) V14(0.975,-3.576) V15(1.626,-3.576) V16(2.276,-3.576) V17(2.926,-3.576) V18(3.576,-3.576) V19(4.224,-3.576) V21(5.524,-3.576) V22(6.175,-3.576) V23(6.825,-3.576) V24(7.475,-3.576) W1(-7.475,-4.224) W2(-6.825,-4.224) W3(-6.175,-4.224) W5(-4.874,-4.224) W6(-4.224,-4.224) W7(-3.576,-4.224) W8(-2.926,-4.224) W9(-2.276,-4.224) W10(-1.626,-4.224) W11(-0.975,-4.224) W12(-0.325,-4.224) W13(0.325,-4.224) W14(0.975,-4.224) W15(1.626,-4.224) W16(2.276,-4.224) W17(2.926,-4.224) W18(3.576,-4.224) W19(4.224,-4.224) W21(5.524,-4.224) W22(6.175,-4.224) W23(6.825,-4.224) W24(7.475,-4.224) Y1(-7.475,-4.874) Y2(-6.825,-4.874) Y3(-6.175,-4.874) Y5(-4.874,-4.874) Y6(-4.224,-4.874) Y7(-3.576,-4.874) Y8(-2.926,-4.874) Y9(-2.276,-4.874) Y10(-1.626,-4.874) Y11(-0.975,-4.874) Y12(-0.325,-4.874) Y13(0.325,-4.874) Y14(0.975,-4.874) Y15(1.626,-4.874) Y16(2.276,-4.874) Y17(2.926,-4.874) Y18(3.576,-4.874) Y19(4.224,-4.874) Y21(5.524,-4.874) Y22(6.175,-4.874) Y23(6.825,-4.874)
BGA96_P080_10X14MM
  round 0.356 smd: A1(-3.2,6.002) A2(-2.4,6.002) A3(-1.6,6.002) A7(1.6,6.002) A8(2.4,6.002) A9(3.2,6.002) B1(-3.2,5.202) B2(-2.4,5.202) B3(-1.6,5.202) B7(1.6,5.202) B8(2.4,5.202) B9(3.2,5.202) C1(-3.2,4.402) C2(-2.4,4.402) C3(-1.6,4.402) C7(1.6,4.402) C8(2.4,4.402) C9(3.2,4.402) D1(-3.2,3.602) D2(-2.4,3.602) D3(-1.6,3.602) D7(1.6,3.602) D8(2.4,3.602) D9(3.2,3.602) E1(-3.2,2.802) E2(-2.4,2.802) E3(-1.6,2.802) E7(1.6,2.802) E8(2.4,2.802) E9(3.2,2.802) F1(-3.2,2.002) F2(-2.4,2.002) F3(-1.6,2.002) F7(1.6,2.002) F8(2.4,2.002) F9(3.2,2.002) G1(-3.2,1.201) G2(-2.4,1.201) G3(-1.6,1.201) G7(1.6,1.201) G8(2.4,1.201) G9(3.2,1.201) H1(-3.2,0.401) H2(-2.4,0.401) H3(-1.6,0.401) H7(1.6,0.401) H8(2.4,0.401) H9(3.2,0.401) J1(-3.2,-0.399) J2(-2.4,-0.399) J3(-1.6,-0.399) J7(1.6,-0.399) J8(2.4,-0.399) J9(3.2,-0.399) K1(-3.2,-1.199) K2(-2.4,-1.199) K3(-1.6,-1.199) K7(1.6,-1.199) K8(2.4,-1.199) K9(3.2,-1.199) L1(-3.2,-1.999) L2(-2.4,-1.999) L3(-1.6,-1.999) L7(1.6,-1.999) L8(2.4,-1.999) L9(3.2,-1.999) M1(-3.2,-2.799) M2(-2.4,-2.799) M3(-1.6,-2.799) M7(1.6,-2.799) M8(2.4,-2.799) M9(3.2,-2.799) N1(-3.2,-3.599) N2(-2.4,-3.599) N3(-1.6,-3.599) N7(1.6,-3.599) N8(2.4,-3.599) N9(3.2,-3.599) P1(-3.2,-4.399) P2(-2.4,-4.399) P3(-1.6,-4.399) P7(1.6,-4.399) P8(2.4,-4.399) P9(3.2,-4.399) R1(-3.2,-5.199) R2(-2.4,-5.199) R3(-1.6,-5.199) R7(1.6,-5.199) R8(2.4,-5.199) R9(3.2,-5.199) T1(-3.2,-5.999) T2(-2.4,-5.999) T3(-1.6,-5.999) T7(1.6,-5.999) T8(2.4,-5.999) T9(3.2,-5.999)
C0402
  rect 0.711x0.508 smd: 1(-0.533,0) 2(0.533,0)
C0603
  rect 0.914x0.813 smd: 1(-0.826,0) 2(0.826,0)
PAD120-4-ECX
  round 3.2 hole 3.2 unplated: (0,0)
  round 0.711 hole 0.406: 1(2.159,0) 2(0,2.159)
  round 0 smd: 3(-2.159,0) 4(0,-2.159)
PAD120-4-ECX#2
  round 3.2 hole 3.2 unplated: (0,0)
  round 0.711 hole 0.406: 1(2.159,0) 3(-2.159,0) 4(0,-2.159)
  round 0 smd: 2(0,2.159)
PAD120-4-ECX#3
  round 3.2 hole 3.2 unplated: (0,0)
  round 0.711 hole 0.406: 1(2.159,0) 4(0,-2.159)
  round 0 smd: 2(0,2.159) 3(-2.159,0)
PAD120-4-ECX#4
  round 3.2 hole 3.2 unplated: (0,0)
  round 0.711 hole 0.406: 1(2.159,0) 2(0,2.159) 3(-2.159,0)
  round 0 smd: 4(0,-2.159)
R0402
  rect 0.711x0.508 smd: 1(-0.533,0) 2(0.533,0)
R0603
  rect 0.914x0.813 smd: 1(-0.826,0) 2(0.826,0)
R0805
  rect 1.016x1.27 smd: 1(-1.016,0) 2(1.016,0)
SMD-SW-MTA2-WNC-2P
  round 1.143 hole 0.889: G1(218.44,107.071) G2(218.44,111.369)
  rect 0.762x1.397 smd: G3(216.939,109.22)
  rect 0.66x1.143 smd: G4(219.415,111.321) G5(219.415,107.119)
  rect 1.143x0.66 smd: S1(217.14,110.919) S2(217.14,107.521)
SMD_CHOKE_4X4_4H2MM
  rect 1.295x1.803 smd: 1(-2.032,0) 2(2.032,0)
SMDLED_2P_0805-20051213
  rect 1.016x1.27 smd: A(-1.016,0) K(1.016,0)
SOT23-5
  rect 0.66x1.016 smd: 1(-1.016,-1.27) 3(1.016,-1.27) 4(1.016,1.27) 5(-1.016,1.27)
  rect 0.508x1.016 smd: 2(0,-1.27)
SOT23-123
  rect 0.66x1.016 smd: 1(-1.016,-1.118) 2(1.016,-1.118) 3(0,1.118)
SOT23-GDS
  rect 0.66x1.016 smd: D(0,1.118) G(-1.016,-1.118) S(1.016,-1.118)
SOT23_123
  rect 0.787x0.889 smd: 1(-0.95,-1.001) 2(0.95,-1.001) 3(0,1.001)
SOT23_ARC
  rect 0.787x0.889 smd: A(0,1.001) C(-0.95,-1.001) R(0.95,-1.001)
SRP-P260
  rect 0.991x1.499 smd: 1(-1.1,0) 2(1.1,0)
TP30
  round 0.762 smd: 1(0,0)
XTAL-3_2X2_5MM
  rect 1.524x1.27 smd: 1(-1.1,-0.851) 2(1.1,-0.851) 3(1.1,0.851) 4(-1.1,0.851)
XTAL-CM315
  rect 0.61x1.346 smd: 1(-1.204,0) 2(1.204,0)

## Nets
5VSB: CP55.1 CP56.1 CP57.2 CP63.1 FSH1.2 QP2.2 QP3.S RP29.1 RP30.1 RP32.2 RP34.2
AVCC: CK38.1(PIN1) CK39.1(PIN1) CK40.1(PIN1) CK41.1(PIN1) CK42.1(PIN1) CK43.1(PIN1) CP43.2 CP45.2 RZ7.2 U1.C18 U1.E23 U1.F22 U1.G4 U1.K22 U1.R21 UP1.1
AVCC_LVDS: CK63.1(PIN1) RZ7.1 RZ8.1 U1.D11
AVDD: CK44.1(PIN1) CK45.1(PIN1) CK46.1(PIN1) CK47.1(PIN1) CP51.2 RZ5.2 RZ9.2 RZ10.2 U1.D22 U1.H22 U1.J22 UP1.27
DVCCIO: CK62.1(PIN1) RZ5.1 RZ6.1 U1.C7
GND: CD1.2 CD2.2(PIN2) CD3.2(PIN2) CD4.2(PIN2) CD5.2(PIN2) CD6.2(PIN2) CD7.2(PIN2) CD8.2(PIN2) CD9.2(PIN2) CD10.2 CD11.2(PIN2) CD12.2(PIN2) CD13.2(PIN2) CD14.2(PIN2) CD15.2(PIN2) CD16.2(PIN2) CD17.2(PIN2) CD18.2(PIN2) CD24.2(PIN2) CD25.2(PIN2) CD26.2 CD27.2(PIN2) CD28.2(PIN2) CD29.2(PIN2) CE1.2 CK2.2 CK3.2(PIN2) CK4.2(PIN2) CK7.2 CK8.2(PIN2) CK9.2(PIN2) CK10.2(PIN2) CK11.2(PIN2) CK12.2(PIN2) CK13.2 CK14.2(PIN2) CK15.2(PIN2) CK16.2(PIN2) CK17.2(PIN2) CK18.2(PIN2) CK19.2 CK20.2(PIN2) CK21.2(PIN2) CK22.2(PIN2) CK23.2(PIN2) CK24.2(PIN2) CK25.2 CK26.2(PIN2) CK27.2(PIN2) CK28.2(PIN2) CK29.2(PIN2) CK30.2(PIN2) CK31.2(PIN2) CK32.2(PIN2) CK33.2(PIN2) CK34.2(PIN2) CK35.2(PIN2) CK36.2(PIN2) CK37.2(PIN2) CK38.2(PIN2) CK39.2(PIN2) CK40.2(PIN2) CK41.2(PIN2) CK42.2(PIN2) CK43.2(PIN2) CK44.2(PIN2) CK45.2(PIN2) CK46.2(PIN2) CK47.2(PIN2) CK48.2 CK49.2(PIN2) CK50.2(PIN2) CK51.2(PIN2) CK52.2 CK53.2(PIN2) CK54.2 CK55.2(PIN2) CK56.2 CK60.2 CK61.2(PIN2) CK62.2(PIN2) CK63.2(PIN2) CP3.2 CP5.1 CP6.2 CP7.2 CP8.2 CP10.1 CP11.1 CP12.2 CP13.2 CP14.2 CP16.2 CP17.2 CP18.2 CP19.1 CP20.1 CP21.1 CP22.2 CP23.2 CP24.1 CP25.1 CP26.1 CP27.2 CP28.2 CP29.2 CP31.2 CP32.1 CP33.2 CP34.1 CP35.2 CP36.1 CP37.2 CP38.2 CP39.1 CP40.2 CP41.2 CP42.1 CP43.1 CP45.1 CP46.1 CP47.2 CP48.2 CP49.1 CP50.2 CP51.1 CP52.1 CP53.2 CP54.1 CP55.2 CP56.2 CP57.1 CP61.2 CP62.1 DP1.A LED1.K LED2.K LED3.K MH1.1 MH2.1 MH3.1 MH4.1 RD7.1 RD8.2(PIN2) RD9.2(PIN2) RF2.1 RK3.2 RK28.1 RK31.1 RK32.2 RP5.1 RP7.2 RP11.1 RP17.1 RP19.2 RP22.1 RP28.2 RP33.1 RS24.1 SW1.G1 SW1.G2 SW1.G3 SW1.G4 SW1.G5 SW2.G1 SW2.G2 SW2.G3 SW2.G4 SW2.G5 SW2.S2 SW3.G1 SW3.G2 SW3.G3 SW3.G4 SW3.G5 SW3.S1 TP8.1 TP9.1 U1.AB3 U1.AC15 U1.C21 U1.C22 U1.D3 U1.D4 U1.D10 U1.D18 U1.E4 U1.F9 U1.F10 U1.F11 U1.F18 U1.F19 U1.G9 U1.G10 U1.G11 U1.G18 U1.G19 U1.G22 U1.H8 U1.H9 U1.H10 U1.H11 U1.H12 U1.H13 U1.H14 U1.H15 U1.H16 U1.H17 U1.H18 U1.H19 U1.J8 U1.J9 U1.J10 U1.J11 U1.J12 U1.J13 U1.J14 U1.J15 U1.J16 U1.J17 U1.J18 U1.J19 U1.K3 U1.K8 U1.K9 U1.K10 U1.K11 U1.K12 U1.K13 U1.K14 U1.K15 U1.K16 U1.K17 U1.K23 U1.L6 U1.L7 U1.L8 U1.L9 U1.L10 U1.L11 U1.L12 U1.L13 U1.L14 U1.L15 U1.L16 U1.L17 U1.M6 U1.M7 U1.M8 U1.M9 U1.M10 U1.M11 U1.M12 U1.M13 U1.M14 U1.M15 U1.M16 U1.M17 U1.M18 U1.M19 U1.N6 U1.N7 U1.N8 U1.N9 U1.N10 U1.N11 U1.N12 U1.N13 U1.N14 U1.N15 U1.N16 U1.N17 U1.P5 U1.P6 U1.P7 U1.P8 U1.P9 U1.P10 U1.P11 U1.P12 U1.P13 U1.P14 U1.P15 U1.P16 U1.P17 U1.R5 U1.R6 U1.R7 U1.R8 U1.R9 U1.R10 U1.R11 U1.R12 U1.R13 U1.R14 U1.R15 U1.R16 U1.R17 U1.T5 U1.T6 U1.T7 U1.T8 U1.T9 U1.T10 U1.T11 U1.T12 U1.T13 U1.T14 U1.T15 U1.T16 U1.T17 U1.U7 U1.U8 U1.U9 U1.U10 U1.U11 U1.U12 U1.U13 U1.U14 U1.U15 U1.U16 U1.U17 U1.V7 U1.V8 U1.V9 U1.V10 U1.V11 U1.V12 U1.V13 U1.V14 U1.V15 U1.V16 U1.V17 U1.W9 U1.W10 U1.W11 U1.W12 U1.W13 U1.W14 U1.W15 U1.Y9 U1.Y10 U1.Y11 U1.Y12 U1.Y13 U1.Y14 U1.Y15 UD1.A9 UD1.B1 UD1.B3 UD1.B9 UD1.D1 UD1.D8 UD1.E1 UD1.E2 UD1.E8 UD1.F9 UD1.G1 UD1.G8 UD1.G9 UD1.J2 UD1.J8 UD1.M1 UD1.M9 UD1.P1 UD1.P9 UD1.T1 UD1.T9 UD2.A9 UD2.B1 UD2.B3 UD2.B9 UD2.D1 UD2.D8 UD2.E1 UD2.E2 UD2.E8 UD2.F9 UD2.G1 UD2.G8 UD2.G9 UD2.J2 UD2.J8 UD2.M1 UD2.M9 UD2.P1 UD2.P9 UD2.T1 UD2.T9 UP1.69 UP2.2 UP3.2 UP4.1 YK1.2 YK1.4
SVCC: CP31.1 CP35.1 UP1.4 UP4.3
VCC: CK33.1(PIN1) CK34.1(PIN1) CK35.1(PIN1) CK36.1(PIN1) CK37.1(PIN1) CK60.1 CP22.1 CP23.1 CP40.1 CP53.1 LP4.2 RK4.2 RK6.2 RK10.2 RK11.2 RK18.2 RK21.2 RK30.2 RS34.1 RZ1.1 RZ2.1 RZ3.2 RZ6.2 RZ8.2 U1.K18 U1.K19 U1.L18 U1.L19 UP1.33 UP1.37 UP1.56
VCC3V1: CP48.1 CP49.2 UP1.28
VCC_3V3: CP41.1 CP42.2 UP1.43
VCCIO: CK61.1(PIN1) RZ3.1 RZ4.1 U1.N18
VCCQ: CK50.1(PIN1) CK51.1(PIN1) U1.D5 U1.D6
VDD1V8: CK52.1 CP38.1 CP46.2 RP5.2 RP17.2 RZ4.2 UP1.20 UP1.45 UP2.1 UP3.1
VDD_CORE: CK13.1 CK14.1(PIN1) CK15.1(PIN1) CK16.1(PIN1) CK17.1(PIN1) CK18.1(PIN1) CP30.1 CP33.1 CP34.2 LP5.2 RP18.2 U1.F6 U1.F7 U1.F8 U1.G6 U1.G7 U1.G8 U1.H6 U1.H7 U1.J6 U1.J7 U1.K6 U1.K7
VDD_CPU: CK7.1 CK8.1(PIN1) CK9.1(PIN1) CK10.1(PIN1) CK11.1(PIN1) CK12.1(PIN1) CP6.1 CP7.1 CP8.1 LP1.2 U1.P18 U1.P19 U1.R18 U1.T18 U1.U18 U1.U19 U1.V18 U1.V19 U1.W16 U1.W17 U1.W18 U1.W19 U1.Y16 U1.Y17 U1.Y18 U1.Y19 UP1.42
VDD_GPU: CK19.1 CK20.1(PIN1) CK21.1(PIN1) CK22.1(PIN1) CK23.1(PIN1) CK24.1(PIN1) CP15.1 CP18.1 CP19.2 LP3.2 RP6.2 U1.D14 U1.D15 U1.D16 U1.F12 U1.F13 U1.F14 U1.F15 U1.F16 U1.F17 U1.G12 U1.G13 U1.G14 U1.G15 U1.G16 U1.G17
VDDQ: CD1.1 CD2.1(PIN1) CD3.1(PIN1) CD4.1(PIN1) CD5.1(PIN1) CD6.1(PIN1) CD7.1(PIN1) CD8.1(PIN1) CD9.1(PIN1) CD10.1 CD11.1(PIN1) CD12.1(PIN1) CD13.1(PIN1) CD14.1(PIN1) CD15.1(PIN1) CD16.1(PIN1) CD17.1(PIN1) CD18.1(PIN1) CD19.1(PIN1) CD20.1(PIN1) CD21.1(PIN1) CD22.1(PIN1) CD23.1(PIN1) CK25.1 CK26.1(PIN1) CK27.1(PIN1) CK28.1(PIN1) CK29.1(PIN1) CK30.1(PIN1) CK31.1(PIN1) CK32.1(PIN1) CP16.1 CP17.1 LP2.2 RD2.1 RD3.2 U1.AA15 U1.AA16 U1.AB15 U1.AB16 U1.J5 U1.K4 U1.K5 U1.L5 U1.M5 U1.N5 U1.U5 U1.U6 U1.V5 U1.V6 U1.W5 U1.W6 U1.W7 U1.W8 U1.Y5 U1.Y6 U1.Y7 U1.Y8 UD1.A1 UD1.A8 UD1.B2 UD1.C1 UD1.C9 UD1.D2 UD1.D9 UD1.E9 UD1.F1 UD1.G7 UD1.H2 UD1.H9 UD1.K2 UD1.K8 UD1.N1 UD1.N9 UD1.R1 UD1.R9 UD2.A1 UD2.A8 UD2.B2 UD2.C1 UD2.C9 UD2.D2 UD2.D9 UD2.E9 UD2.F1 UD2.G7 UD2.H2 UD2.H9 UD2.K2 UD2.K8 UD2.N1 UD2.N9 UD2.R1 UD2.R9 UP1.32
VDDTX: CK53.1(PIN1) RZ10.1 U1.E22
AOUTL: UP1.64
AOUTR: UP1.65
AUXIN: UP1.23
CK: RD1.2(PIN2) RD4.1(PIN1) RD5.1(PIN1) UD1.J7 UD2.J7
CK#: RD4.2(PIN2) RD5.2(PIN2) RD6.2(PIN2) UD1.K7 UD2.K7
CLKO_24M: RE20.1 RK32.1 U1.K24
CONOFF: SW1.S1 SW2.S1 UP1.6
CSI_AVDD: CK54.1 RZ9.1 U1.P21
CSI_CN: U1.N24
CSI_CP: U1.N22
CSI_DN0: U1.P23
CSI_DN1: U1.M22
CSI_DP0: U1.P22
CSI_DP1: U1.M23
DDR3_A0: U1.W2 UD1.N3 UD2.N3
DDR3_A1: U1.AC6 UD1.P7 UD2.P7
DDR3_A2: U1.AD7 UD1.P3 UD2.P3
DDR3_A3: U1.AD6 UD1.N2 UD2.N2
DDR3_A4: U1.W1 UD1.P8 UD2.P8
DDR3_A5: U1.V2 UD1.P2 UD2.P2
DDR3_A6: U1.AC8 UD1.R8 UD2.R8
DDR3_A7: U1.U2 UD1.R2 UD2.R2
DDR3_A8: U1.AD9 UD1.T8 UD2.T8
DDR3_A9: U1.V1 UD1.R3 UD2.R3
DDR3_A10: U1.AC4 UD1.L7 UD2.L7
DDR3_A11: U1.AC7 UD1.R7 UD2.R7
DDR3_A12: U1.AD5 UD1.N7 UD2.N7
DDR3_A13: U1.U1 UD1.T3 UD2.T3
DDR3_A14: U1.AD8 UD1.T7 UD2.T7
DDR3_A15: U1.AA1 UD1.M7 UD2.M7
DDR3_BA0: U1.Y2 UD1.M2 UD2.M2
DDR3_BA1: U1.AC5 UD1.N8 UD2.N8
DDR3_BA2: U1.Y1 UD1.M3 UD2.M3
DDR3_CAS#: U1.AB2 UD1.K3 UD2.K3
DDR3_CK0: RD1.1(PIN1) U1.AD1
DDR3_CK0#: RD6.1(PIN1) U1.AD2
DDR3_CKE0: U1.AD3 UD1.K9 UD2.K9
DDR3_CKE1: U1.AC3 UD1.J9 UD2.J9
DDR3_CS0: U1.AA2 UD1.L2 UD2.L2
DDR3_CS1: U1.K1 UD1.L1 UD2.L1
DDR3_DQ0: U1.V3 UD1.D7
DDR3_DQ1: U1.L3 UD1.A2
DDR3_DQ2: U1.T3 UD1.C2
DDR3_DQ3: U1.N3 UD1.C3
DDR3_DQ4: U1.U3 UD1.A7
DDR3_DQ5: U1.AA3 UD1.C8
DDR3_DQ6: U1.M3 UD1.A3
DDR3_DQ7: U1.Y3 UD1.B8
DDR3_DQ8: U1.M2 UD1.E3
DDR3_DQ9: U1.T2 UD1.H8
DDR3_DQ10: U1.M1 UD1.F2
DDR3_DQ11: U1.R1 UD1.F7
DDR3_DQ12: U1.P1 UD1.H3
DDR3_DQ13: U1.T1 UD1.F8
DDR3_DQ14: U1.L1 UD1.G2
DDR3_DQ15: U1.P2 UD1.H7
DDR3_DQ16: U1.AC10 UD2.E3
DDR3_DQ17: U1.AD13 UD2.H8
DDR3_DQ18: U1.AD10 UD2.F2
DDR3_DQ19: U1.AD14 UD2.F7
DDR3_DQ20: U1.AD12 UD2.H3
DDR3_DQ21: U1.AC14 UD2.F8
DDR3_DQ22: U1.AC9 UD2.G2
DDR3_DQ23: U1.AC12 UD2.H7
DDR3_DQ24: U1.AB7 UD2.C3
DDR3_DQ25: U1.AB12 UD2.C8
DDR3_DQ26: U1.AB5 UD2.A2
DDR3_DQ27: U1.AD15 UD2.A7
DDR3_DQ28: U1.AB10 UD2.C2
DDR3_DQ29: U1.AB14 UD2.D7
DDR3_DQ30: U1.AB6 UD2.A3
DDR3_DQ31: U1.AB11 UD2.B8
DDR3_DQM0: U1.W3 UD1.D3
DDR3_DQM1: U1.R2 UD1.E7
DDR3_DQM2: U1.AC13 UD2.E7
DDR3_DQM3: U1.AB13 UD2.D3
DDR3_DQS0: U1.P3 UD1.C7
DDR3_DQS0#: U1.R3 UD1.B7
DDR3_DQS1: U1.N1 UD1.F3
DDR3_DQS1#: U1.N2 UD1.G3
DDR3_DQS2: U1.AD11 UD2.F3
DDR3_DQS2#: U1.AC11 UD2.G3
DDR3_DQS3: U1.AB8 UD2.C7
DDR3_DQS3#: U1.AB9 UD2.B7
DDR3_ODT0: U1.AB1 UD1.K1 UD2.K1
DDR3_ODT1: U1.AC1 UD1.J1 UD2.J1
DDR3_RAS#: U1.AC2 UD1.J3 UD2.J3
DDR3_RST#: CD26.1 RD2.2 UD1.T2 UD2.T2
DDR3_VREF: CD19.2(PIN2) CD20.2(PIN2) CD21.2(PIN2) CD22.2(PIN2) CD23.2(PIN2) CD24.1(PIN1) CD25.1(PIN1) CD27.1(PIN1) CD28.1(PIN1) CD29.1(PIN1) RD3.1 RD7.2 U1.AB4 UD1.H1 UD1.M8 UD2.H1 UD2.M8
DDR3_WE#: U1.AD4 UD1.L3 UD2.L3
DDR3_ZQ: RK3.1 U1.L2
ETH_CRS_DV/GPIOA18: U1.J4
ETH_MDC: RE1.2
ETH_MDC/GPIOA22: RE1.1 U1.J3
ETH_MDIO: RE2.2
ETH_MDIO/GPIOA23: RE2.1 U1.G3
ETH_REF_CLK: RE3.1 U1.G2
ETH_RXD0/GPIOA20: U1.J1
ETH_RXD1/GPIOA19: U1.J2
ETH_RXER/GPIOA17: U1.H4
ETH_TXD0: RNP1.2
ETH_TXD0/GPIOA14: RNP1.1 U1.H2
ETH_TXD1: RNP1.4
ETH_TXD1/GPIOA15: RNP1.3 U1.H3
ETH_TXEN: RNP1.6
ETH_TXEN/GPIOA16: RNP1.5 U1.G1
GPIOA25/SIRQ1: U1.V21
GPIOA28/PCM0_IN: U1.AC16
GPIOB0/PCM0_OUT: U1.AD18
GPIOB1/PCM0CLK: U1.AC18
GPIOB2/PCM0_SYNC: U1.AD19
GPIOB3/KS_IN0: U1.N21
GPIOB4/KS_IN1: U1.M21
GPIOB5/KS_IN2: U1.L21
GPIOC14/SD1_D0: U1.U22
GPIOC16/SD1_D1: U1.V23
GPIOC16/SD1_D2: U1.T23
GPIOC17/SD1_D3: U1.T24
GPIOC20/SD1_CMD: U1.T22
GPIOC21/SD1_CLK: U1.U23
GPIOC23/SPI0_MOSI: U1.AC19
GPIOC24/SPI0_SS: U1.AB19
GPIOC31: U1.R22
GPIOD10: U1.T21
GPIOD12/SPI2_MISO: U1.B2
GPIOD13/SPI2_MOSI: U1.A2
GPIOD14/SPI2_SCLK: U1.B3
GPIOD15/SPI2_SS: U1.A3
GPIOD16/NAND_CE2B: U1.E3
GPIOD21/UART2_RTSB: U1.AB22
GPIOD22/UART3_RX: U1.AD23
GPIOD23/UART3_TX: U1.AD24
GPIOD24/UART3_RTSB: U1.AC23
GPIOD25/UART3_CTSB: U1.AC24
GPIOD28/PCM1_IN: U1.AA21
GPIOD29/PCM1_CLK: U1.Y21
GPIOD30/PCM1_SYNC: U1.AA22
GPIOD31/PCM1_OUT: U1.W21
HDMI_CEC: U1.B22
HOSCI: CK4.1(PIN1) U1.J23 YK1.1
HOSCO: CK3.1(PIN1) U1.J24 YK1.3
HP_DETECT: RS34.2
HPD: U1.A22
I2S_D0: U1.AD16 UP1.51
I2S_D1: U1.AB17 UP1.50
I2S_LRCLK0: U1.AD17 UP1.52
I2S_MCLK0: U1.AC17 UP1.53
KS_IN3: RP9.1 RP11.2 U1.K21
KS_OUT0: RP20.1 RP22.2 U1.J21
KS_OUT1: TP25.1 U1.L22
KS_OUT2: RP16.2 U1.L23
LOSCI: RP12.2 UP1.8 YP1.2
LOSCO: RP12.1 UP1.7 YP1.1
M_DSI_CN: U1.B7
M_DSI_CP: U1.A7
M_DSI_DN0: U1.B6
M_DSI_DN1: U1.C8
M_DSI_DP0: U1.A6
M_DSI_DP1: U1.B8
MIC_GND: RS24.2
MICIN: UP1.58
NAND_D0: RF2.2 SW3.S2 U1.B1
NAND_D1: U1.C2
NAND_D2: U1.C1
NAND_D3: U1.D1
NAND_D4: U1.E2
NAND_D5: U1.F3
NAND_D6: U1.F2
NAND_D7: U1.F1
NAND_DQS: U1.C3
NAND_RDB: U1.B4
NAND_RDBN: U1.C4
PMU_BAT: LED3.A UP1.19
POR: RK22.1 UP1.5
POR#: CK2.1 RK21.1 RK22.2 U1.D21
PWM0: RP23.1 UP1.68
RCA_JACK: RK29.2
REM_CON: UP1.24
RTCVDD: CP27.1 CP28.1 LED2.A RP8.1 UP1.9
RXD2/INTB: RK19.2
SD0_CLK: U1.W22
SD0_CMD: U1.W24
SD0_D0: U1.Y23
SD0_D1: U1.Y22
SD0_D2: U1.V24
SD0_D3: U1.W23
SD_VCC: CP54.2 UP1.36
SENS_1V8: CP52.2 UP1.22
SIRQ0: RK19.1 U1.V22
SIRQ2: U1.U21 UP1.54
SYSPWR: CP5.2 CP10.2 CP11.2 CP14.1 CP20.2 CP21.2 CP25.2 CP26.2 CP29.1 CP47.1 CP50.1 QP1.S RP27.2 UP1.2 UP1.18 UP1.29 UP1.31 UP1.34 UP1.40 UP1.41 UP2.4 UP3.4
TMDS_AVDD: CK48.1 CK49.1(PIN1) U1.C19
TNCK: U1.B21
TPCK: U1.A21
TVCVBS: RK29.1 U1.F4
TWI0_SCK: RZ2.2 U1.AA23 UP1.47
TWI0_SDA: RZ1.2 U1.AA24 UP1.48
TWI1_SCK: RK6.1 U1.AC20
TWI1_SDA: RK4.1 U1.AB20
TWI2_SCK: RK11.1 U1.AB23
TWI2_SDA: RK10.1 U1.AB24
TWI3_SCK/SPI0_SCLK: U1.AB18
TWI3_SDA/SPI0_MISO: U1.AA19
TX_CLK: CE1.1 RE3.2
TXON0: U1.C20
TXON1: U1.A19
TXON2: U1.A18
TXOP0: U1.B20
TXOP1: U1.B19
TXOP2: U1.B18
U3_DM0: U1.D24
U3_DP0: U1.D23
U3_HSIN: U1.A24
U3_HSIP: U1.A23
U3_HSON: CU5.2 U1.B23
U3_HSOP: CU6.2 U1.B24
UART0_RX: U1.AC22
UART0_TX: U1.AD22
UART2_CTSB: U1.AB21
UART2_RX: U1.AC21
UART2_TX: RK18.1 U1.AD21
USB2_VBUS0: RK27.1
USB3_VBUS0: CP12.1 CP13.1 RP4.1
USB3_VBUS1: RK24.1
USB_DM1: U1.F24
USB_DM2: U1.G24
USB_DP1: U1.F23
USB_DP2: U1.G23
USB_IDPIN0: RK30.1 RK31.2 U1.C24
USB_IDPIN2: RK28.2 U1.D20
VMICEXT: UP1.57
VR15: CK55.1(PIN1) U1.E21
VREFI: CP36.2 CP37.1 UP1.60 UP4.2
VRO: RS30.2 UP1.59
VROS: RS30.1 UP1.61
VSD_PAD: CK56.1 U1.AA20
WALL: CP3.1 QP1.D RP25.2 RP27.1 UP1.16
XTAL2: RE20.2
ZQ0: RD8.1(PIN1) UD1.L8
ZQ1: RD9.1(PIN1) UD2.L8
N25759327: RK24.2 U1.C23
N25759415: RK27.2 U1.H23
N25897671: QP1.G UP1.14
N25897831: RP4.2 UP1.17
N25898512: LP1.1 UP1.38 UP1.39
N25898722: CP32.2 RP16.1 UP1.3
N25898852: LP2.1 UP1.30
N25898856: LP4.1 UP1.35
N25925005: LP3.1 UP2.3
N25925011: CP15.2 RP6.1 RP7.1 RP10.2 UP2.5
N25925194: CP24.2 RP9.2 RP10.1
N25925251: CP39.2 RP20.2 RP21.1
N25925253: CP30.2 RP18.1 RP19.1 RP21.2 UP3.5
N25925313: LP5.1 UP3.3
N25965409: LED1.A RP23.2
N25995583: CU5.1
N25995594: CU6.1
N26092971: RP8.2 SW1.S2
N26207059: CP9.1 UP1.10
N26207062: CP9.2 UP1.11
N26480454: TP16.1 U1.K2
N26763720: CP44.2 DP1.C RP30.2 RP31.1
N26763723: CP44.1 QP2.1 RP31.2
N26766733: DP1.R RP28.1 RP29.2
N26769154: CP62.2 FSH1.1
N26809825: CP63.2 QP2.3 QP3.G RP32.1 RP33.2
N26813437: QP3.D RP25.1
N26834402: CP61.1 RP34.1

Pads without a net: MH1 2 3 4; MH2 2 3 4; MH3 2 3 4; MH4 2 3 4; RNP1 7 8; U1 A1 A4 A9 A10 A12 A13 A15 A16 B5 B9 B10 B11 B12 B13 B14 B15 B16 B17 C5 C6 C10 C11 C12 C14 C15 C16 C17 D2 D17 F21 G21 H21 M24 N19 N23 R19 R23 R24 T19; UD1 L9; UD2 L9; UP1 12 13 15 21 25 26 44 46 49 55 62 63 66 67

## Via types
v1: diameter 0.406, hole 0.203, TOP to BOTTOM, 899 vias
v2: diameter 0.457, hole 0.254, TOP to BOTTOM, 1 via
v3: diameter 0.762, hole 0.457, TOP to BOTTOM, 2 vias

## Routing (per net, layer and track width the routed paths; a pad name or vN(x,y) marks a point on that pad's centre or on a via; arc(x,y) is an arc through that point)
5VSB:
  vias: v1(1.27,18.85) v1(1.27,17.93) v1(1.68,19.3) v1(1.68,18.41) v1(10.64,27.36) v1(10.64,26.59) v1(10.64,25.86) v1(10.64,25.17)
AVCC: length 46.3
  TOP w0.254: 48.41,40.51 48.41,40.97 v1(48.41,40.97) ; U1.C18 v1(56.21,35.91) ; 55.3,30.86 55.74,30.86 v1(55.75,30.84) ; U1.F22 v1(57.58,32.69) ; 52.54,29.01 v1(52.54,28.55)
  TOP w0.305: U1.E23 58.06,32.67 v1(58.37,32.36)
  BOTTOM w0.254: 55.4,30.35 55.4,30.49 v1(55.75,30.84)
  BOTTOM w0.305: v1(52.54,28.55) 52.55,28.56 53.25,28.56 53.7,28.12 53.7,27.99 ; CK42.1 58.85,31.87 v1(58.37,32.36)
  BOTTOM w0.381: v1(57.58,32.69) 57.5,32.61 56.52,32.61 56.51,32.62 ; 56.59,35.48 56.59,35.53 v1(56.21,35.91) ; 56.03,40.56 v1(56.59,41.12) 57.03,41.56 57.1,41.56
  BOTTOM w0.508: v1(22.66,45.34) 20.62,45.34 19.91,44.63 19.91,42.37 18.44,40.89 18.44,39.27 18.6,39.11 18.6,34.6 16.13,32.13 16.13,29.9 16.99,29.03 16.99,22.86 19.32,20.54 19.32,18.55 18.67,17.91 18.67,17.04 17.09,15.47 v1(15.72,15.47)
  vias: v1(15.72,16.15)
AVCC_LVDS: length 4.4
  TOP w0.254: v1(53.42,38.3) 53.39,38.3 53.03,38.67 53,38.67
  BOTTOM w0.381: 55.28,39.81 54.51,40.57 54.51,39.71 54.52,39.7 54.52,39.31 53.72,38.51 53.62,38.51 v1(53.42,38.3)
AVDD: length 21.8
  TOP w0.203: v1(6.88,11.71) 7.01,11.58 7.06,11.58 7.36,11.28 UP1.27
  TOP w0.254: v1(56.24,31.33) 56.24,31.32 56.23,31.32 55.76,31.32 ; 56.22,31.78 v1(56.69,31.78) ; U1.D22 v1(58.52,33.61)
  TOP w0.381: v1(56.54,44.78) 56.54,44.3 56.36,44.12 CK44.1 55.77,44.65 55.77,45.21
  L4 w0.508: v1(58.65,22.96) 59.53,22.96 62.53,25.97 62.53,26.16 62.89,26.52 62.89,30.63 61.77,31.75 v1(61.29,31.75)
  BOTTOM w0.203: v1(6.88,11.71) 6.91,11.68 7.42,12.19 CP51.2
  BOTTOM w0.381: CK47.1 58.11,33.96 58.46,33.61 v1(58.52,33.61) ; v1(61.29,31.75) 60.65,32.39 60.65,32.87 ; 57.51,24.26 57.51,24.18 58.65,23.04 v1(58.65,22.96)
DVCCIO: length 7.6
  TOP w0.089: 51.62,40.97 52.07,40.97 54.53,43.43 54.53,43.97 55.02,44.46 55.02,44.71 53.54,46.19 53.54,46.31
GND: length 291.2
  TOP w0.127: v1(46.11,48.69) 45.59,48.69 44.2,47.29 44.2,47.04 44.81,46.43 v1(44.81,46.35) 44.88,46.35 45.54,45.69 45.54,43.89 v1(46.63,42.8) ; v1(46.43,43.97) 46.43,46.18 46.15,46.46 46.15,46.67 46.6,47.12
  TOP w0.152: v1(57.12,33.15) 57.12,33.14 56.68,32.69 56.68,32.24
  TOP w0.203: v1(33.32,31.5) 33.25,31.42 33.25,29.72 32.61,29.08 29.69,29.08 29.24,29.54 29.24,31.9 29.08,32.05 28.37,32.05 28.14,32.28 28.14,32.61 27.88,32.87 27.66,32.87 27.51,33.02 v1(27.51,33.3) 27.51,33.6 27.76,33.86 29.08,33.86 29.34,33.6 v1(29.34,33.27) 29.87,33.27 30.15,33.55 30.15,35.2 30.68,35.74 32,35.74 32.49,35.26 32.49,33.3 32.77,33.02 v1(33.17,33.02)
  TOP w0.254: U1.C21 58.06,34.97 v1(58.06,34.98) ; U1.K23 v1(56.24,30.4) ; U1.C22 v1(58.98,34.07) ; U1.D10 52.48,39.19 52.48,39.59 52.94,40.06 v1(52.98,40.06) ; U1.P16 50.7,32.23 v1(50.7,32.23) ; U1.E4 v1(49.32,41.88) U1.D4 ; 50.24,31.31 50.24,31.77 v1(50.24,31.78) ; 26.78,21.73 UD2.J8 ; v1(13.61,17.81) 13.87,18.06 14.4,18.06 14.66,18.31 14.66,18.59 14.92,18.86 14.92,19.47 15.9,20.45 v1(15.9,20.73) 15.9,21.54 15.44,22 14.63,22 14.2,21.56 v1(14.2,21.49) 13.92,21.49 13.54,21.87 12.19,21.87 12.01,21.69 12.01,20.66 11.82,20.47 v1(11.66,20.47) 11.66,20.45 12.32,19.79 12.32,18.08 v1(12.12,17.88) ; U1.D3 49.32,42.8 v1(49.33,42.8) ; v1(44.27,32.24) 43.94,32.24 43.6,32.58 43.27,32.58 41.77,34.07 41.77,34.07 ; U1.R15 v1(49.78,32.23) ; UD1.J8 26.78,37.99 ; v1(55.75,35.45) 56.22,35.45 ; UD1.J2 26.78,42.74 26.78,42.74
  TOP w0.305: 54.38,32.69 54.83,32.69 54.84,32.69 ; UD1.A9 33.18,36.7 v1(33.2,36.68) ; U1.L9 48.86,36.82 v1(48.87,36.82) ; v1(47.04,37.73) 47.03,37.72 U1.M6 ; U1.P11 47.93,34.07 v1(47.93,34.08) ; v1(44.73,32.69) 44.73,32.69 45.19,32.69 ; v1(44.27,32.24) 44.27,32.24 44.73,32.24 ; v1(46.1,34.08) 46.11,34.07 U1.T9 ; v1(49.33,36.36) 49.32,36.36 U1.L10 ; U1.T7 45.2,34.99 v1(45.19,35) ; 51.62,34.53 52.06,34.53 v1(52.07,34.52) ; v1(44.73,36.37) 44.73,36.37 45.19,36.37 ; 51.62,35.45 52.06,35.45 v1(52.07,35.46) ; 47.49,31.31 47.49,30.88 v1(47.47,30.86) ; U1.R14 49.32,31.78 v1(49.33,31.78) ; v1(52.55,33.15) 52.55,33.15 U1.L16 ; v1(52.07,36.37) 52.07,36.37 51.62,36.37 ; U1.V7 44.28,34.07 v1(44.27,34.06) ; v1(32.66,20.42) 32.66,20.47 32.38,20.76 UD2.B9 ; U1.V9 45.2,33.15 v1(45.19,33.16) ; v1(50.24,37.3) 50.24,37.3 U1.J10 ; 55.3,34.53 54.85,34.53 v1(54.84,34.52) ; UD2.B1 32.38,27.81 v1(32.41,27.84) ; v1(29.21,20.42) 29.18,20.45 UD2.F9 ; 46.11,28.09 46.11,27.64 v1(46.1,27.64) ; UD2.G8 28.38,21.73 v1(28.75,21.36) ; U1.V12 47.03,31.33 v1(47.02,31.32) ; v1(45.64,36.36) 45.65,36.37 U1.P6 ; UD1.G8 28.38,37.99 v1(28.75,37.62) ; U1.N8 47.05,35.91 v1(47.04,35.92) ; 54.84,32.69 54.84,33.15 ; 54.84,32.69 v1(54.86,32.66) ; 51.62,33.61 52.09,33.61 v1(52.1,33.61) ; U1.T13 48.4,31.79 v1(48.41,31.78) ; v1(51.16,35.46) 51.15,35.45 U1.K12 ; U1.N7 46.56,36.37 v1(46.56,36.37) ; 46.11,30.86 46.55,30.86 v1(46.56,30.86) 46.57,30.87 46.57,31.32 ; 51.16,38.67 51.63,38.67 v1(51.64,38.66) 51.62,38.64 51.62,38.21 ; v1(51.61,35.92) 51.61,35.91 U1.J12 ; v1(28.6,36.66) 28.6,36.66 28.38,36.88 UD1.G9 ; U1.J18 53.47,33.15 v1(53.47,33.15) ; v1(47.47,34.53) 47.48,34.53 47.95,34.53 ; U1.M13 50.69,34.07 v1(50.7,34.08) ; v1(50.7,32.23) 50.7,32.24 U1.N15 ; U1.U7 44.74,34.53 v1(44.73,34.54) ; U1.N14 50.24,32.69 v1(50.24,32.69) ; v1(46.1,32.25) 46.12,32.23 U1.V11 ; U1.V10 45.66,32.69 v1(45.64,32.71) ; U1.L11 v1(49.78,35.91) ; UD2.E2 29.98,26.53 v1(29.57,26.11) ; 47.95,31.77 47.95,31.33 v1(47.93,31.32) ; 45.19,31.78 45.19,32.23 v1(45.19,32.23) 45.19,32.24 45.65,32.24 ; v1(30.35,37.62) 29.98,37.99 UD1.E8 ; U1.P5 45.19,36.83 v1(45.19,36.83) ; U1.N11 48.41,34.53 v1(48.41,34.53) ; v1(44.27,35.92) 44.28,35.91 44.73,35.91 ; U1.R7 45.65,35.45 v1(45.64,35.45) ; v1(50.24,34.54) 50.23,34.53 U1.M12 ; v1(50.24,31.78) 50.24,31.78 U1.P15 ; U1.P13 49.32,32.69 v1(49.33,32.69) ; v1(47.47,31.78) 47.49,31.79 U1.U12 ; 46.11,31.78 v1(45.64,31.78) 45.65,31.77 45.65,31.32 ; U1.J9 v1(49.78,37.76) ; U1.V8 44.74,33.61 v1(44.73,33.6) ; U1.J8 48.87,37.75 v1(48.87,37.75) 48.86,37.74 U1.K8 ; U1.T16 v1(49.78,30.38) ; v1(46.1,36.83) 46.1,36.83 U1.N6 ; v1(52.55,32.23) 52.55,32.23 U1.M17 ; U1.T8 45.66,34.53 v1(45.64,34.55) ; v1(46.1,35) 46.11,34.99 U1.R8 ; v1(46.1,35.9) 46.11,35.91 U1.P7 ; U1.J14 52.51,34.99 v1(52.53,34.98) 52.54,34.96 U1.J15 ; U1.H10 50.7,37.75 v1(50.7,37.76) 50.69,37.75 U1.H9 ; 47.95,32.69 47.95,32.25 v1(47.96,32.24) ; v1(46.56,34.54) 46.56,34.53 U1.R9 ; U1.M9 48.4,36.36 v1(48.41,36.37) ; v1(48.87,33.15) 48.87,33.61 U1.P12 ; v1(47.47,33.62) 47.48,33.61 47.95,33.61 ; v1(47.96,36.83) 47.95,36.82 47.95,36.37 ; U1.R10 47.02,34.07 v1(47.02,34.08) ; U1.T10 46.57,33.61 v1(46.56,33.62) ; U1.N12 49.32,33.61 v1(49.33,33.6) ; v1(48.41,30.86) 48.4,30.87 48.4,31.31 ; U1.R13 48.86,32.24 v1(48.87,32.23) ; 49.32,31.31 49.32,30.86 v1(49.33,30.86) ; 47.49,29.48 v1(47.96,29.48) 47.95,29.48 47.95,29.94 ; v1(53.92,34.52) 53.91,34.53 U1.H16 ; U1.F19 55.31,34.07 v1(55.3,34.06) 55.3,34.06 U1.G19 ; 53,31.32 53.44,31.32 v1(53.47,31.29) ; 53,32.69 53,32.69 U1.K17 ; 53,32.69 U1.L17 ; 53,32.69 v1(53.01,32.69) ; 52.08,37.75 52.08,38.19 v1(52.1,38.2) ; 45.19,35.45 v1(44.73,35.45) ; v1(31.17,21.36) 30.8,21.73 UD2.D8 ; UD1.D8 30.8,37.99 v1(31.17,37.62) ; v1(50.7,36.85) 50.7,36.84 U1.J11 ; 51.62,32.69 52.09,32.69 v1(52.1,32.69) ; 48.87,29.47 48.86,29.47 U1.V16 ; UD1.B1 32.38,44.06 v1(32.41,44.09) ; U1.U17 49.78,29.46 ; v1(51.61,34.06) 51.6,34.07 U1.L14 ; UD2.E8 29.98,21.73 v1(30.35,21.36) ; 48.41,29.95 48.4,29.95 U1.V15 ; v1(51.16,34.54) 51.15,34.53 U1.L13 ; v1(51.16,37.3) 51.16,37.29 U1.H11 ; U1.H15 53,35.44 v1(53.01,35.45) 53,35.45 U1.H14 52.54,35.9 v1(52.53,35.92) 52.52,35.91 U1.H13 ; v1(32.7,26.13) 32.38,25.81 UD2.B3 ; U1.R6 45.19,35.91 v1(45.19,35.91) ; v1(48.87,31.32) 48.86,31.32 U1.T14 ; 41.77,34.07 U1.AB3 ; U1.N13 v1(49.78,33.15) ; U1.K15 52.55,34.07 v1(52.55,34.07) ; U1.U11 46.57,32.69 v1(46.56,32.71) ; U1.M7 47.49,37.26 v1(47.5,37.27) ; UD2.G9 28.38,20.4 v1(28.37,20.4) ; v1(46.58,40.06) 46.57,40.04 U1.K3 ; v1(53.01,33.61) 53,33.61 U1.K16 ; v1(49.33,37.28) 49.32,37.28 U1.K9 ; U1.P8 46.57,35.45 v1(46.56,35.46) ; 49.32,29.01 U1.V17 ; U1.R12 48.4,32.7 v1(48.41,32.69) ; v1(47.96,30.4) 47.95,30.41 47.95,30.85 ; v1(29.57,42.37) 29.98,42.78 UD1.E2 ; v1(32.7,42.38) 32.38,42.07 UD1.B3 ; v1(48.41,37.29) 48.4,37.28 U1.L8 ; v1(32.38,36.68) 32.38,36.68 UD1.B9 ; U1.M10 48.86,35.9 v1(48.87,35.91) ; v1(49.33,29.92) 49.32,29.93 U1.U16 ; U1.J17 53.92,33.61 v1(53.92,33.6) 53.93,33.61 U1.H18 ; U1.T11 47.03,33.15 v1(47.02,33.16) ; 47.49,30.4 47.49,29.96 v1(47.47,29.95) 47.46,29.94 U1.Y14 ; U1.N10 v1(47.96,34.99) ; v1(51.61,37.76) 51.62,37.75 51.62,37.29 ; 47.49,37.75 47.49,38.18 v1(47.5,38.19) ; U1.M11 49.32,35.45 v1(49.33,35.45) ; U1.P9 47.02,34.99 v1(47.02,34.99) ; U1.G18 54.39,34.07 v1(54.38,34.06) 54.37,34.07 U1.H17 53.91,34.06 v1(53.47,34.06) 53.46,34.07 U1.J16 ; v1(33.2,20.42) 33.18,20.44 UD2.A9 ; U1.U9 45.65,33.61 v1(45.64,33.62) ; U1.K11 50.24,36.36 v1(50.24,36.36) ; U1.U10 46.11,33.15 v1(46.1,33.16) ; U1.T17 50.24,29.95 v1(50.24,29.95) ; v1(45.19,34.06) 45.2,34.07 U1.U8 ; U1.H8 v1(49.78,38.68) ; v1(29.21,36.68) 29.18,36.71 UD1.F9 ; U1.K13 51.6,34.99 v1(51.61,35) ; v1(50.7,35) 50.69,34.99 U1.L12 ; 47.95,37.29 47.95,37.73 v1(47.96,37.74) ; v1(51.64,33.16) 51.63,33.15 U1.M15 ; U1.M14 51.15,33.61 v1(51.16,33.6) ; U1.Y13 47.01,30.4 v1(47.02,30.4) 47.03,30.42 47.03,30.86 ; v1(48.87,30.39) 48.86,30.4 U1.U15 ; U1.G9 51.15,38.21 v1(51.16,38.22) 51.16,38.21 U1.G10 ; U1.K10 v1(49.78,36.82) ; v1(49.78,32.23) U1.P14 ; 47.95,35.45 v1(47.5,35.45)
  TOP w0.356: 26.78,26.48 26.45,26.15 26.41,26.15 v1(26.37,26.11) ; 26.78,37.99 26.77,37.99 v1(26.37,38.38) ; v1(27.2,22.15) 26.78,21.73 ; UD1.M9 v1(24.38,36.65) ; UD2.M9 v1(24.38,20.4) ; UD2.T9 21.11,20.93 v1(20.73,20.55) ; v1(26.37,42.37) 26.41,42.41 26.45,42.41 26.78,42.74 ; UD2.P9 22.78,20.31 v1(22.79,20.32) ; v1(21.18,44.12) UD1.T1 ; v1(21.18,27.86) UD2.T1 ; v1(20.73,36.8) 21.11,37.19 UD1.T9 ; v1(22.79,36.58) 22.78,36.56 UD1.P9
  TOP w0.381: v1(30.78,44.09) 30.78,44.09 UD1.D1 ; v1(30.18,44.04) 30.18,43.97 29.98,43.77 UD1.E1 ; v1(37.59,45.75) 37.7,45.64 38.41,45.64 ; v1(52.48,46.48) 52.48,46.65 52.83,47.01 ; v1(30.78,27.84) 30.78,27.83 UD2.D1 ; v1(24.84,26.95) 24.74,26.95 24.38,27.3 24.38,27.34 UD2.M1 ; v1(28.37,44.09) 28.38,44.09 UD1.G1 ; UD2.E1 29.98,27.82 v1(30,27.84) ; U1.M18 52.54,32.22 v1(52.55,32.23) ; UD2.J2 26.78,26.49 26.78,26.48 ; 55.6,43.41 55.6,42.8 55.17,42.37 v1(55.17,42.34) ; UD2.P1 v1(22.78,27.86) ; UD1.M1 24.38,43.59 v1(24.77,43.97) ; UD1.P1 v1(22.78,44.12) ; v1(28.42,27.99) 28.5,27.91 28.5,27.45 UD2.G1
  TOP w0.508: SW2.G5 22.62,0.8 v1(23.16,1.35) ; v1(46.84,47.93) 46.84,47.22 46.74,47.12 46.6,47.12 ; DP1.A 15.34,23.09 v1(15.49,22.94) ; RP7.2 68.96,34.54 v1(69.14,34.72) ; CD26.2 17.73,25.07 v1(17.73,24.54) ; UP4.1 v1(19.74,17.02) ; v1(23.39,2.13) 24.36,3.1 24.36,3.3 24.36,3.3 SW2.G3 SW1.G3 ; v1(27.53,1.37) 26.96,0.8 SW2.G4 ; v1(4.22,49.07) 3.86,49.43 SW3.G3 ; RD9.2 v1(23.57,18.39) ; v1(17.93,18.34) 17.88,18.29 CP31.2 ; SW3.G4 0.88,47.95 v1(1.45,48.51) ; SW1.G1 26.48,6.4 SW1.G5 ; CP24.1 65.43,34.57 65.89,34.11 v1(65.84,34.11) ; v1(64.77,35.71) 65.32,36.26 CP14.2 ; SW3.G5 0.88,52.11 v1(1.57,52.81) ; CP35.2 v1(18.01,19.56) ; SW3.S1 3.71,47.73 v1(4.19,48.21) ; SW1.G4 21.68,7.33 v1(21.31,6.96) ; CP61.2 13.86,30.92 v1(13.82,30.96) ; RF2.1 v1(5.08,49.76) ; v1(23.85,34.95) 24.47,34.33 RD8.2 ; v1(13.89,26.47) 13.61,26.19 RP28.2
  L3 w0.127: v1(72.64,39.5) 72.72,39.42 72.72,37.87 72.57,37.72 v1(72.57,37.34) 72.69,37.21 72.69,35.86 67.65,30.82 67.65,30.09 v1(63.65,26.09) ; v1(46.43,43.97) 46.63,43.76 v1(46.63,42.8) ; v1(18.16,13.08) 17.58,13.67 17.12,13.67 16.99,13.54 16.1,13.54
  L3 w0.203: 16.1,12.67 16.23,12.8 17.14,12.8 v1(17.59,12.36) ; 16.1,12.67 16.1,11.05 16.81,10.34 18.36,10.34 18.49,10.21 v1(20.88,10.21) ; 16.1,12.67 16.1,13.89 16.71,14.5 18.21,14.5 19.15,13.56 21.46,13.56 v1(21.49,13.54)
  BOTTOM w0.305: v1(21.18,44.12) 20.99,44.31 CD4.2 ; CD16.2 24.55,44.18 v1(24.77,43.97) ; v1(28.6,36.66) 28.6,36.49 28.54,36.42 CD1.2 ; CK55.2 56.57,33.7 v1(57.12,33.15) ; CD9.2 32.63,36.11 v1(33.2,36.68) ; v1(20.73,36.8) 20.76,36.77 CD8.2 ; 52.32,42.21 52.42,42.21 v1(53.59,43.38) ; CD15.2 26.49,38.5 v1(26.37,38.38) ; v1(55.04,27.1) 54.91,27.23 54.46,27.23 54.4,27.28 ; CD11.2 32.39,44.11 v1(32.41,44.09) ; CD18.2 30.49,44.39 v1(30.78,44.09) ; 51.51,43.03 52.07,43.03 ; v1(46.58,40.06) 46.99,39.65 CK27.2 47.04,39.57 47.83,39.57 47.93,39.68
  BOTTOM w0.381: v1(56.24,30.4) 56.24,29.77 CK41.2 ; CD29.2 28.87,28.44 v1(28.42,27.99) ; v1(57.76,38.1) 57.76,37.5 56.79,36.53 ; RP19.2 v1(67.03,37.36) ; v1(28.75,21.36) 28.68,21.29 CD12.2 ; RK28.1 62.24,35.74 v1(62.43,35.94) ; 56.77,25 56.77,25.17 55.04,26.9 v1(55.04,27.1) ; 58.8,34.67 58.93,34.54 58.93,34.12 v1(58.98,34.07) ; v1(60.73,35.81) 60.2,36.34 59.89,36.34 59.44,36.8 59.44,37.54 ; 44.91,27.43 45.01,27.33 45.8,27.33 v1(46.1,27.64) ; CD3.2 32.87,20.98 33.2,20.65 v1(33.2,20.42) ; 57.02,43.08 57.4,43.08 v1(57.66,43.33) ; UP3.2 73.33,39.75 73.08,39.5 v1(72.64,39.5) ; 60.04,23.93 59.81,23.7 59.44,23.7 v1(59.41,23.67) ; CD13.2 20.84,28.21 v1(21.18,27.86) ; v1(22.78,27.86) 22.66,27.98 CD5.2 ; v1(24.38,20.4) 24.73,20.75 CD28.2 ; CD2.2 20.81,20.63 v1(20.73,20.55) ; CD10.2 24.1,26.21 v1(24.84,26.95) ; v1(30.78,27.84) 30.56,28.06 CD6.2 ; v1(32.41,27.84) 32.34,27.91 CD7.2 ; 55.88,34.78 55.75,34.9 v1(55.75,35.45) ; CD17.2 29.61,39.72 v1(29.62,39.73)
  BOTTOM w0.508: v1(67.46,36.91) 67.98,36.39 67.98,36.24 ; 64.64,30.87 64.53,30.76 v1(63.83,30.76) ; 40.82,34.72 40.82,35.53 42.98,37.69 42.98,37.8 45.48,40.3 46.34,40.3 v1(46.58,40.06) ; RP22.1 68.4,36.88 v1(68.07,37.21) ; CP3.2 10.95,21.18 v1(11.66,20.47) ; RP17.1 73.86,36.37 74.17,36.68 v1(74.88,36.68) ; v1(60.71,38.46) 60.88,38.63 CK19.2 ; CP20.1 17.31,20.26 v1(18.01,19.56) ; CK39.2 57.91,42.26 v1(58.32,42.67) ; v1(28.37,44.09) 28.44,44.16 CD25.2 ; TP9.1 26.23,1.47 SW2.G2 ; v1(57.96,29.97) 57.89,29.97 57.5,30.36 ; CP32.1 12.95,18.72 v1(12.12,17.88) ; 58.87,28.45 59.16,28.45 v1(59.61,28.91) ; CK63.2 v1(52.98,40.06) ; v1(29.11,45.39) 28.55,45.95 RD7.1 ; v1(24.38,36.65) 24.34,36.69 CD24.2 ; v1(47.98,23.9) 47.53,24.35 47.53,24.64 ; CD14.2 22.54,36.83 v1(22.79,36.58) ; v1(64.87,22.56) 64.41,23.01 CK52.2 ; v1(15.9,20.73) 15.52,20.35 CP26.1 ; CP39.1 69.67,35.26 v1(69.14,34.72) ; CP10.1 7.47,6.39 v1(7.47,5.64) ; v1(23.16,1.35) 23.27,1.45 TP8.1 ; 64.97,34.65 65.3,34.65 v1(65.84,34.11)
  vias: v1(1.35,14.61) v1(1.37,15.44) v1(1.47,13.87) v1(1.7,11.53) v1(1.7,7.47) v1(1.7,6.86) v1(1.75,8.28) v1(1.9,33.54) v1(2.01,12.04) v1(1.96,10.77) v1(1.96,8.86) v1(2.16,13.39) v1(2.55,23.37) v1(2.63,33.54) v1(2.57,28.63) v1(2.64,26.67) v1(2.65,24.89) v1(2.7,27.51) v1(2.67,25.7) v1(3.08,24.41) v1(3.15,15.39) v1(3.17,14.33) v1(3.43,33.66) v1(4.68,23.98) v1(4.7,23.27) v1(6.22,1.27) v1(6.91,1.24) v1(7.82,1.17) v1(8.41,1.17) v1(9.42,1.14) v1(9.91,13.87) v1(9.91,13.13) v1(9.91,12.14) v1(9.96,11.23) v1(9.96,10.57) v1(9.98,9.86) v1(10.52,13.08) v1(10.54,12.17) v1(10.49,1.14) v1(10.59,13.87) v1(10.57,11.25) v1(10.57,10.57) v1(10.57,9.88) v1(11.13,9.37) v1(11.3,13.94) v1(12.45,14) v1(12.37,1.14) v1(12.6,9.35) v1(13.26,1.12) v1(13.44,12.85) v1(13.44,12.09) v1(13.41,11.1) v1(13.41,10.34) v1(13.46,13.51) v1(13.46,9.68) v1(14.15,12.78) v1(14.1,11.1) v1(14.1,10.31) v1(14.1,9.65) v1(14.17,13.61) v1(14.17,12.14) v1(14.17,1.12) v1(14.88,1.17) v1(16.03,1.09) v1(16.97,1.19) v1(17.68,1.14) v1(27.41,23.52) v1(28.93,40.26) v1(28.96,24) v1(29.13,24.99) v1(29.18,41.22) v1(34.65,21.29) v1(34.8,23.52) v1(35.36,45.01) v1(35.94,22.43) v1(36.42,39.85) v1(36.42,38.76) v1(37.82,28.8) v1(37.82,27.64) v1(37.9,43.59) v1(57.2,26.59) v1(57.58,28.3) v1(58.52,39.01) v1(58.8,23.72) v1(60.15,38.76) v1(60.33,30.76) v1(60.35,22.48) v1(60.88,30.76) v1(61.14,22.81) v1(63.25,43.51) v1(63.3,44.17) v1(63.45,36.58) v1(63.55,24.49) v1(64.95,44.04) v1(64.95,43.43) v1(71.96,37.82) v1(72.09,36.86) v1(78.28,35.92) v1(78.31,35.23)
